# Allegro board AX7Z010B_AX7Z020B_Allegro.brd
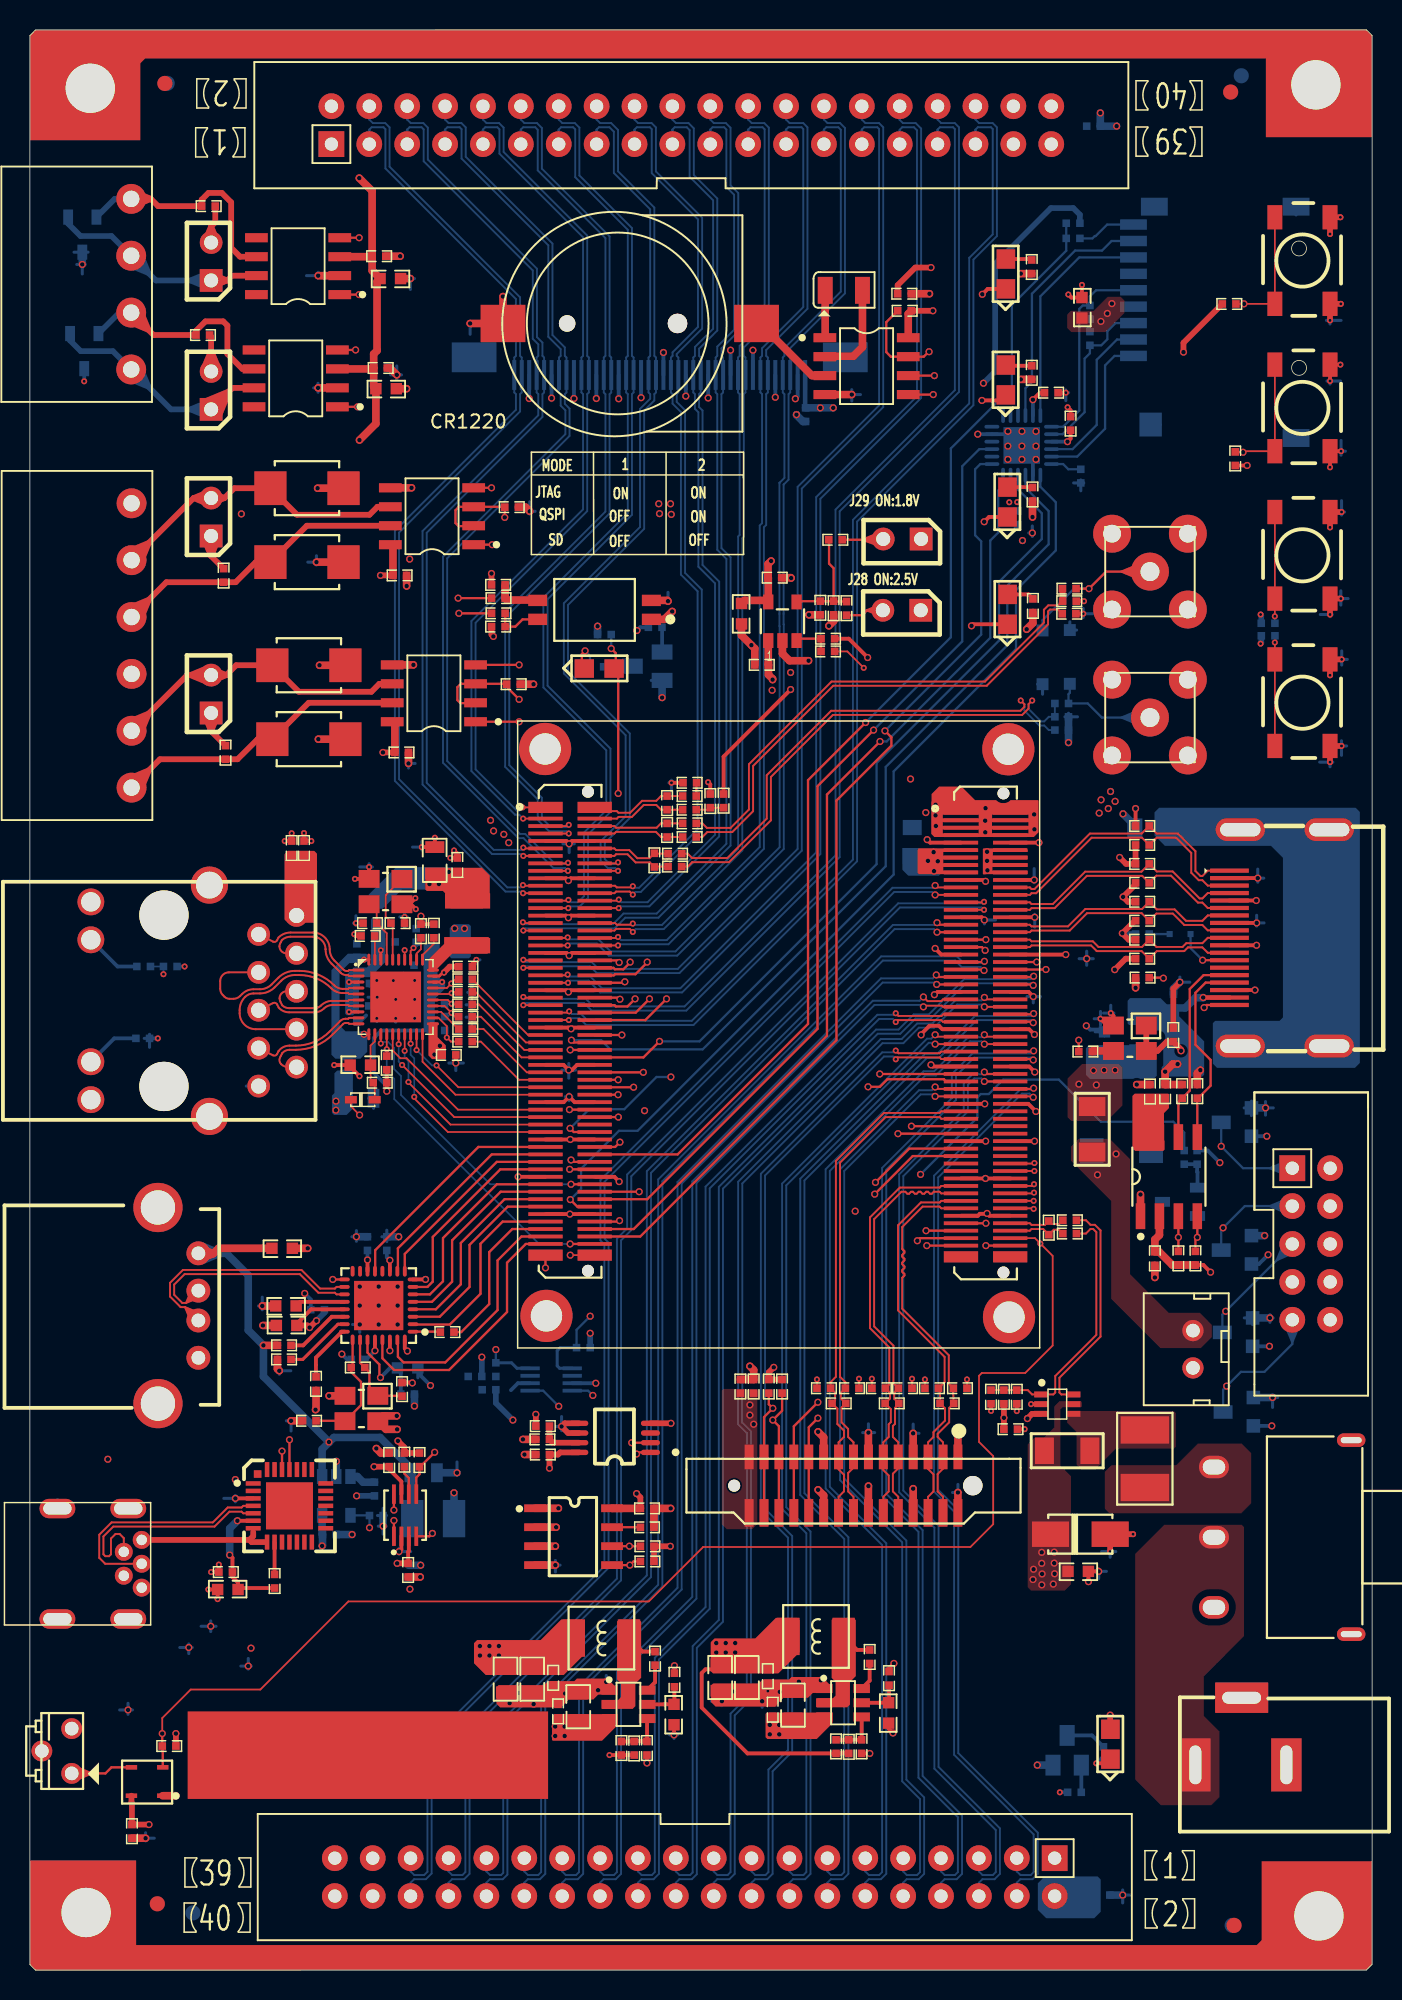
[diagram p0: board, top side]
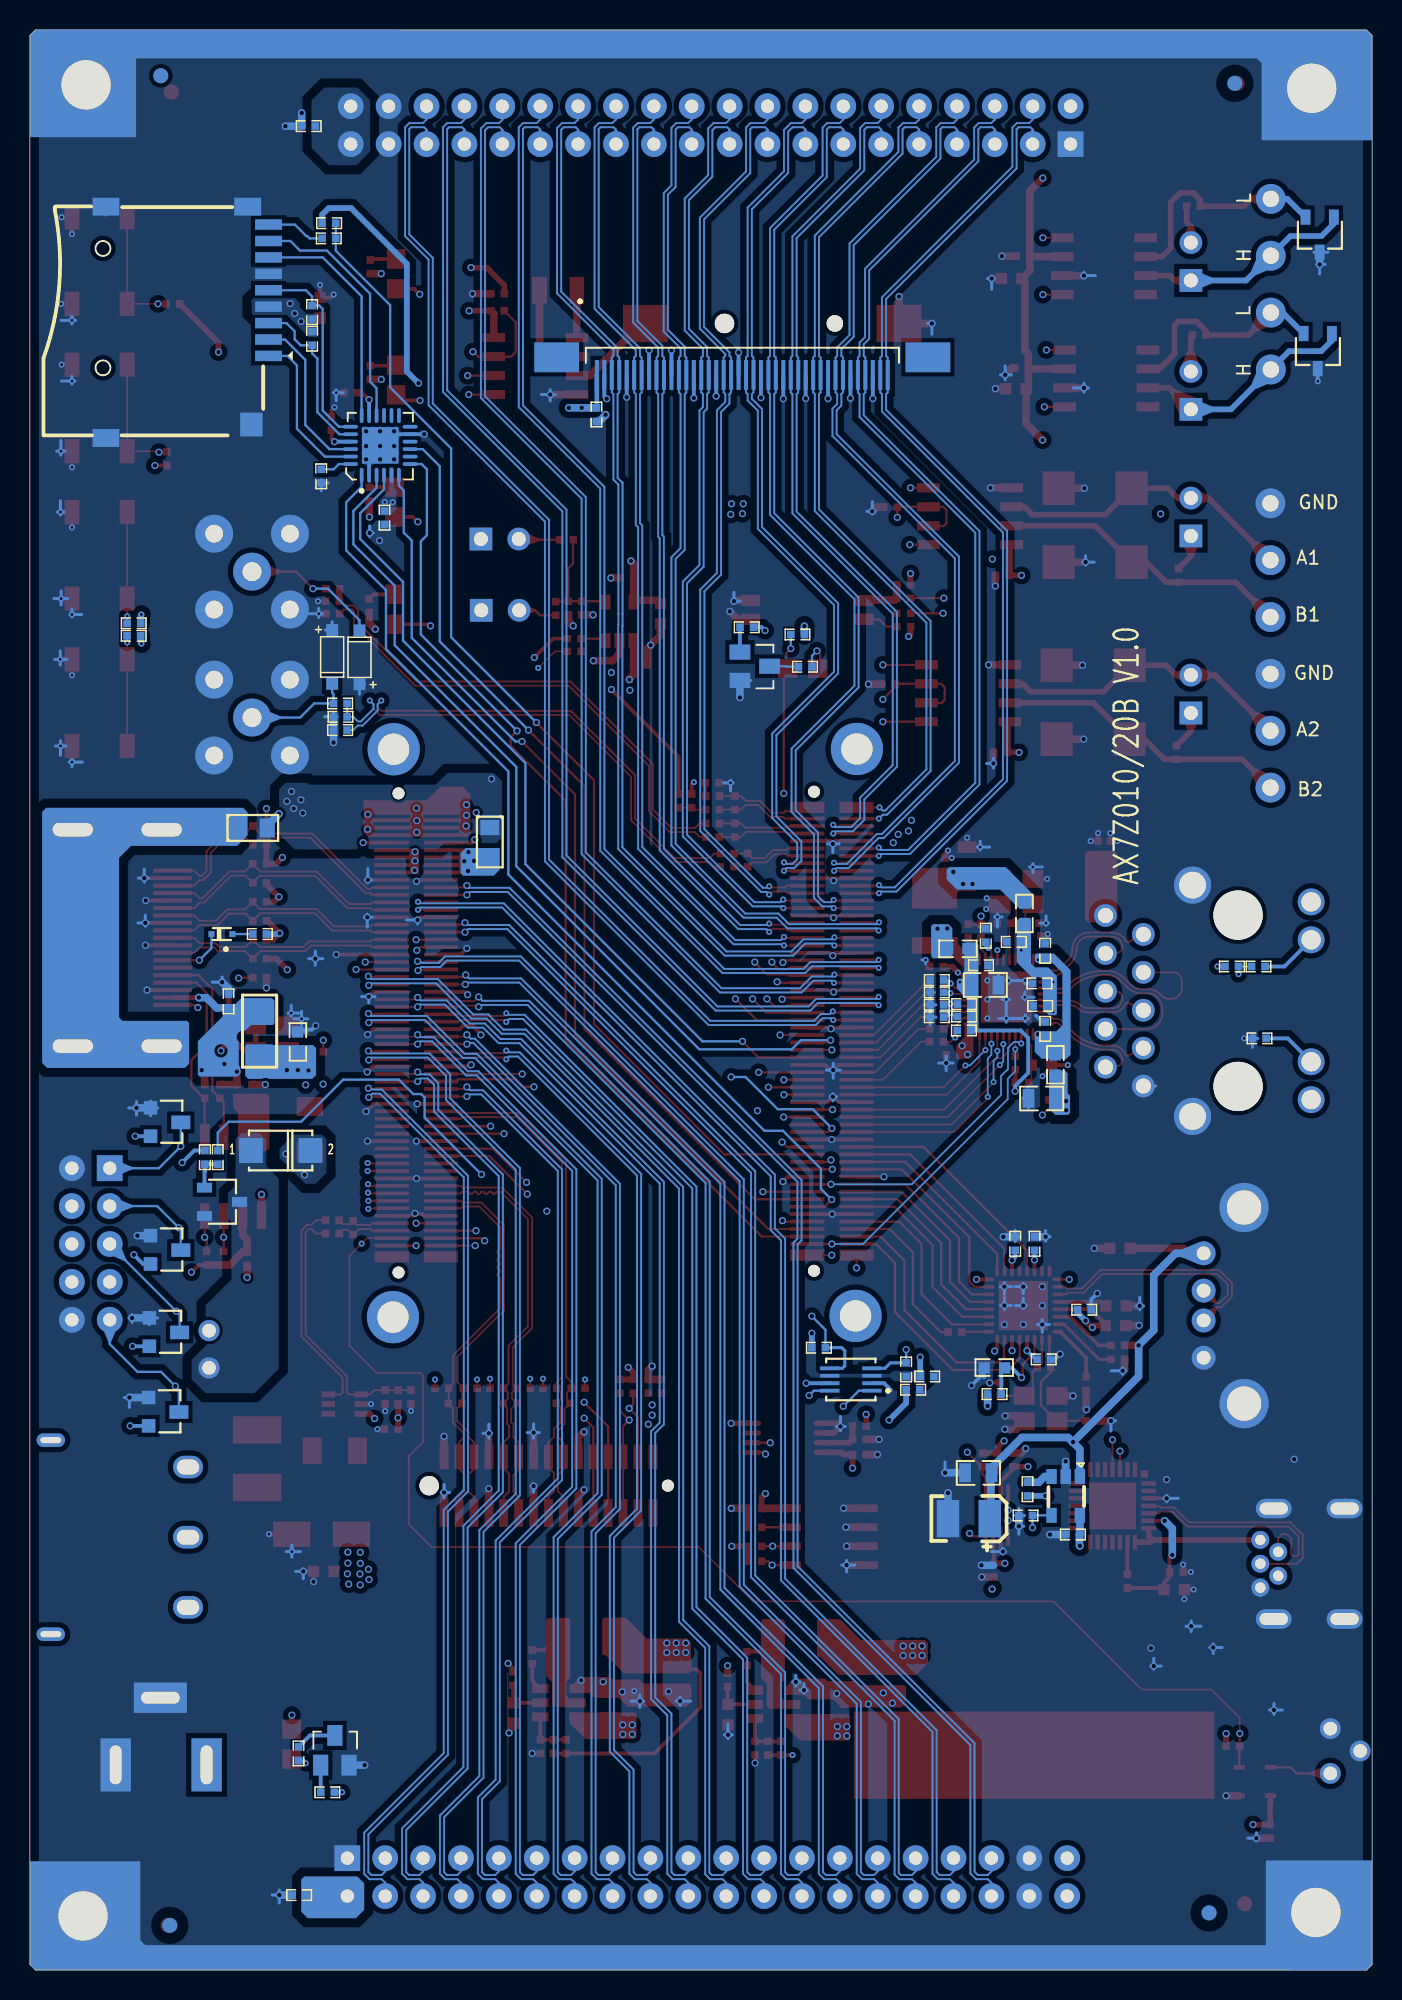
[diagram p1: board, bottom side, seen from below]

Outline 89.99 x 130 mm; copper layers: TOP, L2_GND, L3_SIG, L4_SIG, L5_GND, BOTTOM. Coordinates in mm from the lower left corner of the outline.
Outline path: 0,129.62 0.38,130 89.61,130 89.99,129.62 89.99,0.39 89.61,0.01 0.38,0 0,0.38 0,129.62

## Design rules (mm)
net group HDMI_D0_N: nets HDMI_D0_N HDMI_D0_P
net group IO1_10N: nets IO1_10N IO1_10P
net group IO1_12N: nets IO1_12N IO1_12P
net group IO1_15P: nets IO1_15N IO1_15P
net group IO1_17P: nets IO1_17N IO1_17P
net group IO2_10P: nets IO2_10N IO2_10P
net group PHY_MDI1_N: nets PHY_MDI1_N PHY_MDI1_P
net group PHY_MDI2_P: nets PHY_MDI2_N PHY_MDI2_P
net group PHY_MDI3_N: nets PHY_MDI3_N PHY_MDI3_P
net group BL-DIFF: nets HDMI_SCL HDMI_SDA KEY1 KEY2 KEY3 KEY4 PL_GCLK1
net group ETH_RX: nets ETH_RXCK ETH_RXCTL ETH_RXD0 ETH_RXD1 ETH_RXD2 ETH_RXD3
net group ETH_TX: nets ETH_TXCK ETH_TXCTL ETH_TXD0 ETH_TXD1 ETH_TXD2 ETH_TXD3
net group HDMI: nets HDMI_CLK_N HDMI_CLK_P HDMI_D1_N HDMI_D1_P HDMI_D2_N HDMI_D2_P LP_CLK_N LP_CLK_P LP_LANE0_N LP_LANE0_P LP_LANE1_N LP_LANE1_P MIPI_CLK_N MIPI_CLK_P MIPI_LAN0_N MIPI_LAN0_P MIPI_LAN1_N MIPI_LAN1_P VN VP XADC_AD1N XADC_AD1N_C XADC_AD1P XADC_AD1P_C XADC_AD9N XADC_AD9N_C XADC_AD9P XADC_AD9P_C XADC_AD12N XADC_AD12N_C XADC_AD12P XADC_AD12P_C XADC_VN_C XADC_VP_C
net group J20-DIFF: nets IO1_1N IO1_1P IO1_2N IO1_2P IO1_3N IO1_3P IO1_4N IO1_4P IO1_5N IO1_5P IO1_6N IO1_6P IO1_7N IO1_7P IO1_8N IO1_8P IO1_9N IO1_9P IO1_11N IO1_11P IO1_13N IO1_13P IO1_14N IO1_14P IO1_16N IO1_16P
net group J21-DIFF: nets IO2_1N IO2_1P IO2_2N IO2_2P IO2_3N IO2_3P IO2_4N IO2_4P IO2_5N IO2_5P IO2_6N IO2_6P IO2_7N IO2_7P IO2_8N IO2_8P IO2_9N IO2_9P IO2_11N IO2_11P IO2_12N IO2_12P IO2_13N IO2_13P IO2_14N IO2_14P IO2_15N IO2_15P IO2_16N IO2_16P IO2_17N IO2_17P
net group OTG_DATA: nets OTG_CLK OTG_DATA0 OTG_DATA1 OTG_DATA2 OTG_DATA3 OTG_DATA4 OTG_DATA5 OTG_DATA6 OTG_DATA7 OTG_DIR OTG_NXT OTG_STP
net group PHY_MDI: nets N20328299 N20328339 OTG_D_N OTG_D_P PHY_MDI0_N PHY_MDI0_P
nets with their own width: min track width 0.254; nets GND

## Placement (name value [footprint] x y rotation side)
BT1  BATTERY  [BATSO]  49.72 110.33 0 top
C1  0.1uF/10V  [C0402]  6.85 9.3 270 top
C2  900pF  [C0402]  68.31 49.73 270 top
C3  1uF/25V  [C0402]  17.55 75.19 90 top
C5  900pF  [C0402]  41.87 74.37 90 top
C6  0.1uF/10V  [C0402]  23.51 107.34 180 top
C7  10uF/10V  [C0603]  23.89 105.96 0 top
C8  0.1uF/10V  [C0402]  23.41 114.83 180 top
C9  10uF/10V  [C0603]  24.17 113.34 0 top
C10  0.1uF/10V  [C0402]  24.8 93.45 0 top
C11  0.1uF/10V  [C0402]  25.36 26.8 270 top
C12  0.1uF/10V  [C0402]  24.09 34.19 90 top
C13  1uF/25V  [C0402]  13.13 26.67 180 top
C14  10uF/10V  [C0603]  13.27 25.5 180 top
C15  10uF/10V  [C0603]  70.54 111.38 90 top
C16  0.1uF/10V  [C0402]  68.48 105.69 0 top
C17  0.1uF/10V  [C0402]  66.22 97.31 270 bottom
C18  0.1uF/10V  [C0402]  69.77 103.63 90 top
C19  900pF  [C0402]  42.72 76.38 270 top
C20  900pF  [C0402]  42.72 78.21 90 top
C23  0.01uF/10V  [C0402]  41.92 20.89 90 top
C26  150pF  [C0402]  39.66 14.87 270 top
C29  22uF/10V  [C0805]  36.78 17.65 90 top
C30  0.1uF/10V  [C0402]  35.09 19.57 270 top
C34  22uF/10V  [C0805]  31.89 19.5 270 top
C37  4.7uF/10V  [C0603]  17.21 43.19 180 top
C38  0.1uF/10V  [C0402]  19.29 44.25 180 bottom
C39  0.1uF/10V  [C0402]  22.01 40.92 180 bottom
C40  0.1uF/10V  [C0402]  23.93 48.68 90 bottom
C41  0.1uF/10V  [C0402]  22.64 48.68 90 bottom
C42  10uF/10V  [C0603]  25.33 40.35 0 bottom
C43  4.7uF/10V  [C0603]  17.17 44.5 0 top
C44  18pF/10V  [C0402]  24.96 38.91 270 top
C45  18pF/10V  [C0402]  18.73 36.81 0 top
C46  0.1uF/10V  [C0402]  20.08 29.19 0 bottom
C47  22uF/10V  [C0805]  26.4 33.33 0 bottom
C48  100uF/10V  [TAN-SMB]  27.04 30.25 180 bottom
C49  4.7uF/10V  [C0603]  16.92 48.36 0 top
C50  0.1uF/10V  [C0402]  41.39 30.94 0 top
C51  1uF/25V  [C0402]  47.64 39.12 90 top
C52  0.1uF/10V  [C0402]  34.38 34.55 180 top
C53  0.1uF/10V  [C0402]  24.93 81.59 0 top
C54  0.1uF/10V  [C0402]  75.43 47.68 270 top
C55  10uF/10V  [C0603]  72.05 62.18 90 bottom
C56  0.1uF/10V  [C0402]  76.67 64.92 90 bottom
C57  0.1uF/10V  [C0402]  75.1 58.88 90 top
C58  0.1uF/10V  [C0402]  71.95 5.03 0 bottom
C59  0.1uF/10V  [C0402]  71.31 123.55 0 bottom
C68  0.1uF/10V  [C0402]  49.06 87.45 180 top
C69  10uF/10V  [C0603]  47.71 90.88 270 top
C70  0.1uF/10V  [C0402]  49.95 93.3 0 top
C71  0.1uF/10V  [C0402]  52.01 104.22 270 bottom
C72  0.1uF/10V  [C0402]  48.53 39.12 90 top
C73  10uF/10V  [C0603]  70.29 26.72 0 top
C74  0.1uF/10V  [C0402]  65.76 36.25 0 top
C75  0.1uF/10V  [C0402]  66.17 38.4 270 top
C93  0.1uF/10V  [C0402]  22.27 64.6 0 bottom
C94  0.1uF/10V  [C0402]  21.92 68.31 90 bottom
C97  0.1uF/10V  [C0402]  29.21 67.24 0 top
C101  0.1uF/10V  [C0402]  26.21 67.33 180 bottom
C106  0.1uF/10V  [C0402]  22.31 66.11 0 bottom
C109  22uF/10V  [C0805]  25.94 66 180 bottom
C113  0.1uF/10V  [C0402]  24.04 68.89 0 bottom
C119  0.1uF/10V  [C0402]  21.92 63.08 90 bottom
C127  22uF/10V  [C0805]  22.15 58.41 0 bottom
C151  10uF/10V  [C0603]  43.19 17.13 270 top
C194  150pF  [C0402]  54.05 14.98 270 top
C198  NC  [C0603]  57.58 17.23 270 top
C200  22uF/10V  [C0805]  51.17 17.75 90 top
C203  0.1uF/10V  [C0402]  49.48 19.68 270 top
C204  22uF/10V  [C0805]  48.06 19.61 270 top
C205  22uF/10V  [C0805]  46.27 19.61 270 top
C209  0.01uF/10V  [C0402]  56.3 21 90 top
C214  0.1uF/10V  [C0402]  29.84 39.78 0 bottom
C215  0.1uF/10V  [C0402]  30.78 38.89 0 bottom
C280  0.1uF/10V  [C0402]  76.66 62.66 90 top
C289  0.1uF/10V  [C0402]  58.64 112.32 0 top
C290  18pF/10V  [C0402]  22.79 70.15 180 top
C291  18pF/10V  [C0402]  24.67 70.15 0 top
C292  0.1uF/10V  [C0402]  18.38 75.19 90 top
C293  22uF/10V  [C0805]  27.15 74.36 90 top
C294  0.1uF/10V  [C0402]  28.66 74.06 90 top
C295  0.1uF/10V  [C0402]  28.1 61.32 0 top
C296  NC  [C0603]  22.16 60.64 180 top
C297  22uF/10V  [C0805]  33.67 19.5 270 top
C298  0.1uF/10V  [C0402]  35.41 17.35 90 top
C299  0.1uF/10V  [C0402]  49.8 17.46 90 top
CN1  AJ243-3-3C  [CN1_DCJACK]  84.24 13.75 90 top
D1  BAT54S  [SOT23]  81.9 57.77 270 bottom
D2  BAT54S  [SOT23]  81.9 49.21 270 bottom
D3  BAT54S  [SOT23]  81.98 43.7 270 bottom
D4  BAT54S  [SOT23]  82.03 38.37 270 bottom
D5  SM24CANA-02HTG  [SOT23-3]  3.53 116.28 0 bottom
D6  SM24CANA-02HTG  [SOT23-3]  3.66 108.48 0 bottom
D7  SMBJ6.0CA  [SMBJ6-0CA]  18.58 99.29 180 top
D8  SMBJ6.0CA  [SMBJ6-0CA]  18.58 94.34 180 top
D9  -  [BAS16XV2T1G]  77.11 69.42 180 bottom
D10  SMAJ5.0CA  [SMAJ5]  70.43 29.21 0 top
D11  SMBJ6.0CA  [SMBJ6-0CA]  18.71 82.48 180 top
D12  SMBJ6.0CA  [SMBJ6-0CA]  18.71 87.43 180 top
D14  DL4148  [DO-214AC]  73.18 54.91 180 bottom
D15  B0520LW  [SOD-123]  67.89 87.96 270 bottom
D16  B0520LW  [SOD-123]  69.72 87.99 90 bottom
D17  BAS16XV2T1G  [SOD-523]  22.32 58.32 270 top
F1  PTS120630V012  [L1206]  74.59 62.92 90 bottom
F2  2A  [FUSE_1812]  74.75 34.26 90 top
HOLE1  NC  [FPAD_1]  4.05 126.09 0 top
HOLE2  NC  [FPAD_1]  3.77 3.86 0 top
HOLE3  NC  [FPAD_1]  86.42 3.63 0 top
HOLE4  NC  [FPAD_1]  86.22 126.32 0 top
J1  -  [AXK6A2337YG]  64.07 62.79 270 top
J2  -  [AXK6A2337YG]  36.22 62.9 270 top
J3  HEADER 5X2  [JTAG-10]  84.64 53.73 270 top
J4  MSA Connector  [SMA_P]  75.1 83.92 90 top
J5  MSA Connector  [SMA_P]  75.1 93.7 90 top
J8  2-Jumper  [JUMPER2]  12.15 113.21 90 top
J9  HR911130A  [GE_RJ45]  8.99 70.69 180 top
J10  2-Jumper  [JUMPER2]  12.15 104.57 90 top
J11  2-Jumper  [JUMPER2]  12.15 96.09 90 top
J12  MINI_USB  [MINI_USB_DIP]  6.6 27.23 270 top
J13  Micro SD  [MICRO_SD]  73.99 108.15 270 bottom
J14  -  [CON2_2_54P]  77.98 42.85 270 top
J15  USB TYPEA  [USB_TYPEA]  11.3 48.03 270 top
J19  HDMI Connector (TYPEA)  [MINI_HDMI]  80.42 73.67 90 top
J20  HEADER 20x2/M  [IDC-40J]  44.58 6.23 180 top
J21  HEADER 20x2/M  [IDC-40J]  44.35 123.61 0 top
J22  CON40/NC  [FPC-40-5]  42.23 107.47 0 bottom
J23  CON15  [FPC1025L-NP]  55.22 32.46 180 top
J24  2-Jumper  [JUMPER2]  12.15 84.23 90 top
J28  2-Jumper  [JUMPER2]  59.73 91.11 180 top
J29  2-Jumper  [JUMPER2]  59.75 95.89 180 top
J40  -  [HT3_81-6PL]  6.82 86.85 270 top
J41  -  [HT3_81-4PL]  6.79 107.25 270 top
KEY1  Button  [KEY_4X4X1_5]  85.32 84.92 270 top
KEY2  Button  [KEY_4X4X1_5]  85.32 94.79 270 top
KEY3  Button  [KEY_4X4X1_5]  85.32 104.67 270 top
KEY4  Button  [KEY_4X4X1_5]  85.32 114.54 270 top
L1  2.2uH  [LVS303010]  29.35 69.14 0 top
L2  CMLB041B-4R7MS  [L4_4X4_2]  38.32 22.25 270 top
L6  120OHM@100Mhz  [L0603]  27.78 68.45 180 bottom
L8  120OHM@100Mhz  [L0603]  21.26 60.65 90 bottom
L9  120OHM@100Mhz  [L0603]  23.29 70.81 270 bottom
L11  CMLB041B-4R7MS  [L4_4X4_2]  52.71 22.36 270 top
LED1  POWER  [LED0805]  72.44 15.14 0 top
LED2  DONE  [LED0805]  38.17 87.21 270 top
LED3  RED  [LED0805]  65.55 91.17 0 top
LED4  RED  [LED0805]  65.54 98.36 0 top
LED5  RED  [LED0805]  65.43 106.54 0 top
LED6  RED  [LED0805]  65.44 113.64 0 top
NOREF  -  [unnamed]  8.55 4.45 0 top
NOREF#2  -  [unnamed#2]  65.6 81.8 0 top
NOREF#3  -  [unnamed]  9.05 126.41 0 top
NOREF#4  -  [unnamed#2]  65.65 43.75 0 top
NOREF#5  -  [unnamed#2]  34.54 81.82 0 top
NOREF#6  -  [unnamed]  80.51 125.83 0 top
NOREF#7  -  [unnamed#2]  34.64 43.83 0 top
NOREF#8  -  [#2]  236.27 67.23 0 top
NOREF#9  -  [unnamed]  80.73 3 0 top
NOREF#10  -  [unnamed]  9.21 126.42 180 bottom
NOREF#11  -  [unnamed]  81.22 126.93 180 bottom
NOREF#12  -  [unnamed]  10.93 3.84 180 bottom
NOREF#13  -  [unnamed]  80.61 3 180 bottom
Q1  MMBT3904LT1G  [SOT-23]  69.55 14.72 270 bottom
Q2  MMBT3904LT1G  [SOT-23]  41.4 87.36 0 bottom
Q5  NDS331N  [SOT23-3]  77.11 51.46 270 bottom
R1  10K  [R0402]  31.41 92.81 0 top
R2  10K  [R0402]  31.41 90.02 0 top
R3  20K/1%  [R0402]  31.41 90.91 180 top
R4  20K/1%  [R0402]  31.41 91.92 180 top
R5  2.49K/1%  [R0402]  22.66 69.29 0 top
R8  33R  [R0402]  29.21 66.39 0 top
R9  NC  [R0402]  9.33 15.01 180 top
R10  2K/1%  [R0402]  69.18 84.87 180 bottom
R11  100R/1%  [R0402]  69.71 50.24 180 top
R12  220R/1%  [R0402]  69.18 83.97 0 bottom
R13  100R/1%  [R0402]  69.71 49.35 180 top
R14  200R/1%  [R0402]  69.18 83.08 180 bottom
R15  100K  [R0402]  23.47 59.46 0 top
R23  15K/1%  [R0402]  41.37 14.87 270 top
R25  2K/1%  [R0402]  69.69 92.56 180 top
R26  100R/1%  [R0402]  43.24 73.94 180 top
R27  220R/1%  [R0402]  69.7 91.72 0 top
R28  100R/1%  [R0402]  43.24 74.8 180 top
R29  200R/1%  [R0402]  69.67 90.88 180 top
R30  120R  [R0402]  11.98 118.19 180 top
R31  120R  [R0402]  11.6 109.55 180 top
R32  120R  [R0402]  12.99 93.45 90 top
R33  4.7K  [R0402]  32.3 98.02 180 top
R34  10K  [R0402]  16.41 26.06 270 top
R35  10K  [R0402]  26.12 34.19 90 top
R36  1K  [R0402]  25.11 34.19 270 top
R37  NC  [R0402]  71.07 111.07 270 bottom
R38  4.7K  [R0402]  71.07 109.32 90 bottom
R39  4.7K  [R0402]  70.46 100.1 90 bottom
R40  10K  [R0402]  69.94 117.04 0 bottom
R41  330R  [R0402]  69.94 116.03 180 bottom
R50  100R/1%  [R0402]  44.22 76.83 180 top
R53  4.7K  [R0402]  9.41 67.24 0 bottom
R54  510R  [R0402]  7.63 67.24 0 bottom
R55  4.7K  [R0402]  29.17 66.34 180 bottom
R56  100R/1%  [R0402]  44.22 75.92 180 top
R57  200R/1%  [R0402]  44.25 79.55 0 top
R58  1.5K  [R0402]  25.33 38.59 0 bottom
R59  33R  [R0402]  27.98 42.75 180 top
R60  1M  [R0402]  22 40.38 0 top
R61  8K06  [R0402]  19.19 39.3 90 top
R62  1K  [R0402]  17.06 41.86 0 top
R63  100K  [R0402]  23.11 32.23 90 bottom
R64  10K  [R0402]  23.23 30.46 180 bottom
R65  4.7K  [R0402]  41.39 27.38 180 top
R66  4.7K  [R0402]  41.39 28.4 180 top
R67  0R  [R0402]  41.39 29.67 0 top
R68  0R  [R0805]  59.16 75.59 270 bottom
R69  33R  [R0402]  70.78 61.55 0 top
R70  4.7K  [R0402]  50.43 39.12 90 top
R71  NC  [R0402]  34.38 36.45 180 top
R72  0R  [R0402]  34.38 35.56 0 top
R73  330R  [R0402]  38.52 89.49 180 bottom
R74  10K  [R0402]  70.03 11.92 180 bottom
R75  390R  [R0402]  71.98 14.51 270 bottom
R76  200R/1%  [R0402]  38.01 87.33 180 bottom
R77  330R  [R0402]  67.25 91.42 90 top
R78  330R  [R0402]  67.22 98.88 90 top
R79  330R  [R0402]  67.17 107.04 90 top
R80  330R  [R0402]  67.17 114.12 90 top
R81  10K  [R0402]  83.02 89.4 180 bottom
R82  10K  [R0402]  83.01 90.24 180 bottom
R83  10K  [R0402]  80.81 101.27 270 top
R84  10K  [R0402]  80.4 111.64 180 top
R85  27K  [R0402]  74.59 69.42 0 bottom
R86  49R9  [R0402]  74.59 76.66 0 top
R87  49R9  [R0402]  74.59 75.39 0 top
R88  49R9  [R0402]  74.59 74.12 0 top
R89  49R9  [R0402]  74.59 72.85 0 top
R90  49R9  [R0402]  74.59 71.58 0 top
R91  49R9  [R0402]  74.59 70.31 0 top
R92  49R9  [R0402]  74.59 69.04 0 top
R93  49R9  [R0402]  74.59 67.77 0 top
R94  120R  [R0402]  13.12 81.59 90 top
R95  100K  [R0402]  74.59 66.5 180 top
R96  0R  [R0805]  75.04 76.53 180 bottom
R97  4.7K  [R0402]  32.42 86.16 180 top
R98  1K  [R0402]  78.14 47.7 90 top
R99  1K  [R0402]  77 47.7 90 top
R100  200K  [R0402]  76.11 58.88 270 top
R101  1.5K  [R0402]  77.25 58.88 270 top
R102  1.5K  [R0402]  78.27 58.88 270 top
R108  33.6K/1%  [R0402]  53.89 91.26 90 top
R109  20K/1%  [R0402]  53 91.26 270 top
R110  52.3K 1%  [R0402]  54.75 91.24 270 top
R111  12.7K/1%  [R0402]  54.01 95.84 0 top
R112  4.7K  [R0402]  49.54 39.12 90 top
R113  100R/1%  [R0402]  62.37 38.99 0 top
R114  150R  [R0402]  61.48 37.97 0 top
R115  100R/1%  [R0402]  60.46 38.99 180 top
R116  150R  [R0402]  57.8 37.97 0 top
R117  150R  [R0402]  54.24 37.97 0 top
R118  100R/1%  [R0402]  58.69 38.99 0 top
R119  100R/1%  [R0402]  55.13 38.99 0 top
R120  100R/1%  [R0402]  56.91 38.99 180 top
R121  100R/1%  [R0402]  53.23 38.99 180 top
R122  10K  [R0402]  17.06 40.92 0 top
R126  0.005R 1/4W  [R1206]  69.55 34.8 0 top
R127  220R/1%  [R0402]  45.62 78.34 90 top
R128  2K/1%  [R0402]  46.51 78.34 270 top
R129  100R/1%  [R0402]  44.22 77.75 180 top
R130  100R/1%  [R0402]  44.22 78.66 180 top
R131  6.34K/1%  [R0402]  65.3 38.4 270 top
R132  100R/1%  [R0402]  64.44 38.4 270 top
R148  4.7K  [R0402]  37.11 41.71 0 bottom
R149  4.7K  [R0402]  31.24 40.23 270 bottom
R179  10R  [R1206]  71.22 56.34 270 top
R180  4.7K  [R0402]  78.26 54.46 270 bottom
R181  100R/1%  [R0402]  77.39 54.46 270 bottom
R234  10K  [R0402]  58.64 111.18 180 top
R235  4.7K  [R0402]  27.09 69.62 270 top
R236  1.5K  [R0402]  23.93 60.78 270 top
R237  4.7K  [R0402]  26.22 69.62 90 top
R238  4.7K  [R0402]  25.9 69.32 90 bottom
R239  33R  [R0402]  29.21 65.54 0 top
R240  510R  [R0402]  7.57 62.43 0 bottom
R241  NC  [R0402]  29.17 64.68 180 bottom
R242  NC  [R0402]  29.17 63.85 180 bottom
R243  4.7K  [R0402]  27.35 63.89 180 bottom
R244  4.7K  [R0402]  27.35 64.73 180 bottom
R245  4.7K  [R0402]  27.36 62.96 180 bottom
R246  4.7K  [R0402]  29.17 65.51 180 bottom
R247  18.7K/1%  [R0402]  40.52 14.87 90 top
R248  10K  [R0402]  43.21 19.44 270 top
R249  18K/1%  [R0402]  55.76 14.98 270 top
R250  56.2K/1%  [R0402]  54.9 14.98 90 top
R252  10K  [R0402]  57.6 19.55 270 top
R253  10K  [R0402]  41.92 89.97 180 bottom
R254  0R  [R0402]  53.5 89.21 180 top
R255  NC  [R0402]  53.5 88.35 180 top
R256  33R  [R0402]  29.21 62.21 0 top
R257  33R  [R0402]  29.21 63.06 0 top
R258  33R  [R0402]  29.21 63.88 0 top
R259  33R  [R0402]  29.21 64.71 0 top
RST_KEY  key_side  [TS-026-3_3D8]  2.81 14.68 90 top
SW1  SW DIP-2  [2P2_1_27MM]  37.86 91.14 90 top
SW8  SW SPDT/SM  [SS-12D11]  84.89 29.01 270 top
TP2  NC  [MARK]  34.61 21.72 0 top
TP3  NC  [MARK]  49 21.83 0 top
U1  -  [TCM811TERCTR]  7.86 12.64 90 top
U2  SN65HVD232  [SO8]  20.78 112.26 180 top
U3  SN65HVD232  [SO8]  20.62 104.74 180 top
U4  MAX3485  [SO8]  29.76 95.51 180 top
U5  CP2102-GM  [QFN-28]  17.41 31.11 0 top
U6  TXS0102DCU  [TSSOP8]  25.16 30.48 0 top
U7  TXS02612RTWR  [QFN24_RTW]  66.5 102.16 90 bottom
U8  JL2121-N040I  [QFN40-5X5]  22.03 62.7 0 top
U9  -  [USB3320C]  23.39 44.53 180 top
U10  -  [TPS2051BDBV]  19.6 33.07 270 bottom
U11  24LC04  [8S1_SOIC8]  36.45 29.04 90 top
U12  MAX3485  [SO8]  29.88 83.64 180 top
U13  LM75  [MICRO8]  39.21 35.66 90 top
U15  GTL2002D  [GTL2002GM]  76.37 53.16 0 top
U16  ETA1471FT2G  [SOT23-6]  40.13 17.81 270 top
U17  ETA1471FT2G  [SOT23-6]  54.52 17.92 270 top
U18  SPX3819M5-ADJ  [SOT-23-5]  50.46 90.37 0 top
U27  TXS0102DCU  [TSSOP8]  34.95 39.57 90 bottom
U39  DS1338  [SO8]  53.3 109.37 0 top
U40  INA199A1DCKR  [PDSO-G6]  68.88 37.92 270 top
X2  SiT8008BI21-33E-50.000000  [OSC3225]  73.75 62.44 180 top
Y1  25MHZ  [OSC3225]  23.85 72.27 180 top
Y2  24MHZ  [OSC3225]  22.23 37.63 180 top
Y4  32.768Khz  [OSC3215]  54.57 112.55 0 top

## Library data of the parts
BT1 = BATTERY_5
C1 C2 C5-C9 C11-C20 C23 C26 C29 C34 C37-C47 C49-C52 C54-C59 C68-C71 C73-C75 C93 C94 C97 C101 C106 C109 C113 C119 C127 C151 C194 C198 C200 C204 C205 C209 C214 C215 C280 C289-C291 C293-C297 = CAP NP
C3 C292 = CAP_3
C10 C53 = C0603_0
C30 C72 C203 C298 C299 = C_1
C48 = CAP POL
CN1 = AJ243_0
D1-D4 = SBL1645CT/TO_0
D5 D6 = THBT200S/SIP_2
D7 D8 D11 D12 = 1N5819_0
D9 = BZX84C36/SOT_1
D10 = 1N5819
D14 = BZX84C33/SOT_0
D15 D16 = BZX84C36/SOT_2
D17 = BZX84C36/SOT_0
F1 = FUSE/SM
F2 = FUSE
HOLE1-HOLE4 = TEST POINT
J1 J2 = CONN SOCKET 60x2_0
J3 = HEADER 5X2
J4 J5 = RCA JACK_2
J8 J10 J11 J24 J28 J29 = 2-Jumper_1
J9 = GE_RJ45_2
J12 = USB_B_3
J13 = Micro SD_1
J14 = CON2-2_54P
J15 = USB_B_4
J19 = HDMI Connector
J20 J21 = HEADER 20x2/M
J22 = CON40_0
J23 = CON15_0
J40 = HT3_0
J41 = HT3_81-4PL
KEY1-KEY4 = Button_0
L1 L6 L8 L9 = INDUCTOR
L2 L11 = CHOKE RF-IRON_0
LED1-LED6 = LN211WP
Q1 Q2 = L14P2/TO_1
Q5 = NDS331N
R1-R5 R8 R9 R15 R23 R32-R35 R37-R41 R53-R55 R58-R63 R65-R102 R108-R122 R126 R148 R149 R234-R247 R249 R250 R253-R259 = RESISTOR
R10-R14 R25-R29 R50 R56 R57 R127-R132 = R
R30 R31 R179-R181 = R1005_0
R36 = RESISTOR_0
R64 = RESISTOR: signal model: R_GENERIC_R0402_33R_33R
R248 R252 = 100K
RST_KEY = key_slide_3
SW1 = SW DIP-2
SW8 = SW SPDT/SM_0
TP2 TP3 = TP
U1 = TCM811TERCTR_0
U2 U3 = TJA1050_1
U4 U12 = MAX485
U5 = CP2102_2
U6 U27 = TXS0102DCU_1
U7 = TXS02612RTWR_0
U8 = JL2121D-N040I
U9 = USB3320C-EZK_6
U10 = TPS2051BDBV
U11 = ATSHA204_2
U13 = LM75
U15 = GTL2002GM
U16 U17 = ETA1471FT2G
U18 = SPX3819M5-2-5_0
U39 = DS1338
U40 = INA199A1DCKR
X2 = OSC
Y1 Y2 = X3_0
Y4 = CRYSTAL_1

## Footprints (pads in the part's own frame, mm; a bottom-side part is the same pattern mirrored in y, then rotated)
2P2_1_27MM
  rect 0.76x1.27 smd: 1(-0.635,-3.81) 2(0.635,-3.81) 3(0.635,3.81) 4(-0.635,3.81)
8S1_SOIC8
  rect 0.518x1.458 smd: 1(1.905,2.58) 2(0.635,2.58) 3(-0.635,2.58) 4(-1.905,2.58) 5(-1.905,-2.58) 6(-0.635,-2.58) 7(0.635,-2.58) 8(1.905,-2.58)
AXK6A2337YG
  round 0.8 hole 0.8 unplated: (-16.05,1.2) (16.05,1.2)
  rect 0.75x2.3 smd: 1(-15,-1.65) 2(-15,1.65) 119(15,-1.65) 120(15,1.65)
  rect 0.25x2.3 smd: 3(-14.25,-1.65) 4(-14.25,1.65) 5(-13.75,-1.65) 6(-13.75,1.65) 7(-13.25,-1.65) 8(-13.25,1.65) 9(-12.75,-1.65) 10(-12.75,1.65) 11(-12.25,-1.65) 12(-12.25,1.65) 13(-11.75,-1.65) 14(-11.75,1.65) 15(-11.25,-1.65) 16(-11.25,1.65) 17(-10.75,-1.65) 18(-10.75,1.65) 19(-10.25,-1.65) 20(-10.25,1.65) 21(-9.75,-1.65) 22(-9.75,1.65) 23(-9.25,-1.65) 24(-9.25,1.65) 25(-8.75,-1.65) 26(-8.75,1.65) 27(-8.25,-1.65) 28(-8.25,1.65) 29(-7.75,-1.65) 30(-7.75,1.65) 31(-7.25,-1.65) 32(-7.25,1.65) 33(-6.75,-1.65) 34(-6.75,1.65) 35(-6.25,-1.65) 36(-6.25,1.65) 37(-5.75,-1.65) 38(-5.75,1.65) 39(-5.25,-1.65) 40(-5.25,1.65) 41(-4.75,-1.65) 42(-4.75,1.65) 43(-4.25,-1.65) 44(-4.25,1.65) 45(-3.75,-1.65) 46(-3.75,1.65) 47(-3.25,-1.65) 48(-3.25,1.65) 49(-2.75,-1.65) 50(-2.75,1.65) 51(-2.25,-1.65) 52(-2.25,1.65) 53(-1.75,-1.65) 54(-1.75,1.65) 55(-1.25,-1.65) 56(-1.25,1.65) 57(-0.75,-1.65) 58(-0.75,1.65) 59(-0.25,-1.65) 60(-0.25,1.65) 61(0.25,-1.65) 62(0.25,1.65) 63(0.75,-1.65) 64(0.75,1.65) 65(1.25,-1.65) 66(1.25,1.65) 67(1.75,-1.65) 68(1.75,1.65) 69(2.25,-1.65) 70(2.25,1.65) 71(2.75,-1.65) 72(2.75,1.65) 73(3.25,-1.65) 74(3.25,1.65) 75(3.75,-1.65) 76(3.75,1.65) 77(4.25,-1.65) 78(4.25,1.65) 79(4.75,-1.65) 80(4.75,1.65) 81(5.25,-1.65) 82(5.25,1.65) 83(5.75,-1.65) 84(5.75,1.65) 85(6.25,-1.65) 86(6.25,1.65) 87(6.75,-1.65) 88(6.75,1.65) 89(7.25,-1.65) 90(7.25,1.65) 91(7.75,-1.65) 92(7.75,1.65) 93(8.25,-1.65) 94(8.25,1.65) 95(8.75,-1.65) 96(8.75,1.65) 97(9.25,-1.65) 98(9.25,1.65) 99(9.75,-1.65) 100(9.75,1.65) 101(10.25,-1.65) 102(10.25,1.65) 103(10.75,-1.65) 104(10.75,1.65) 105(11.25,-1.65) 106(11.25,1.65) 107(11.75,-1.65) 108(11.75,1.65) 109(12.25,-1.65) 110(12.25,1.65) 111(12.75,-1.65) 112(12.75,1.65) 113(13.25,-1.65) 114(13.25,1.65) 115(13.75,-1.65) 116(13.75,1.65) 117(14.25,-1.65) 118(14.25,1.65)
BAS16XV2T1G
  rect 0.406x0.406 smd: 1(-0.7,0) 2(0.7,0)
BATSO
  rect 3x2.5 smd: 1(-1,0) 2(-18,0)
  round 1.1 hole 1.1: 3(-13.7,0)
  round 1.3 hole 1.3: 4(-6.3,0)
C0402
  rect 0.508x0.508 smd: 1(-0.457,0) 2(0.457,0)
C0603
  rect 0.762x0.762 smd: 1(-0.686,0) 2(0.686,0)
C0805
  rect 0.787x1.27 smd: 1(-0.889,0) 2(0.889,0)
CN1_DCJACK
  rect 3.556x2.032 hole 2.6x0.8: 1(0,0) 3(0,6.1)
  rect 2.032x3.556 hole 0.8x2.6: 2(4.5,2.997)
CON2_2_54P
  round 1.422 hole 0.914: 1(0,0) 2(2.5,0)
DO-214AC
  rect 1.6x1.676 smd: 1(-1.99,0) 2(1.99,0)
FPAD_1
  round 6.35 hole 3.302: 1(0,0)
FPC1025L-NP
  round 1.3 hole 1.3 unplated: (-8,0)
  rect 0.6x1.65 smd: A1(-7,-1.925) A2(-6,-1.925) A3(-5,-1.925) A4(-4,-1.925) A5(-3,-1.925) A6(-2,-1.925) A7(-1,-1.925) A8(0,-1.925) A9(1,-1.925) A10(2,-1.925) A11(3,-1.925) A12(4,-1.925) A13(5,-1.925) A14(6,-1.925) A15(7,-1.925)
  rect 0.6x1.85 smd: B1(-7,1.825) B2(-6,1.825) B3(-5,1.825) B4(-4,1.825) B5(-3,1.825) B6(-2,1.825) B7(-1,1.825) B8(0,1.825) B9(1,1.825) B10(2,1.825) B11(3,1.825) B12(4,1.825) B13(5,1.825) B14(6,1.825) B15(7,1.825)
  round 0.8 hole 0.8: P2(8,0)
FPC-40-5
  rect 0.27x2 smd: 1(9.75,0.592) 2(9.25,0.592) 3(8.75,0.592) 4(8.25,0.592) 5(7.75,0.592) 6(7.25,0.592) 7(6.75,0.592) 8(6.25,0.592) 9(5.75,0.592) 10(5.25,0.592) 11(4.75,0.592) 12(4.25,0.592) 13(3.75,0.592) 14(3.25,0.592) 15(2.75,0.592) 16(2.25,0.592) 17(1.75,0.592) 18(1.25,0.592) 19(0.75,0.592) 20(0.25,0.592) 21(-0.25,0.592) 22(-0.75,0.592) 23(-1.25,0.592) 24(-1.75,0.592) 25(-2.25,0.592) 26(-2.75,0.592) 27(-3.25,0.592) 28(-3.75,0.592) 29(-4.25,0.592) 30(-4.75,0.592) 31(-5.25,0.592) 32(-5.75,0.592) 33(-6.25,0.592) 34(-6.75,0.592) 35(-7.25,0.592) 36(-7.75,0.592) 37(-8.25,0.592) 38(-8.75,0.592) 39(-9.25,0.592) 40(-9.75,0.592)
  rect 3x2 smd: 41(-12.442,-0.592) 42(12.442,-0.592)
FUSE_1812
  rect 1.829x3.251 smd: 1(-1.93,0) 2(1.93,0)
GE_RJ45
  round 3.3 hole 3.3 unplated: (0,11.48) (0,0)
  round 1.8 hole 1.3: 11(4.9,-0.885) 12(4.9,1.655) 13(4.9,9.825) 14(4.9,12.365)
  round 2.489 hole 1.8: 15(-3.05,-2.01) 16(-3.05,13.49)
  round 1.524 hole 1.016: P1(-8.89,0.025) P2(-6.35,1.295) P3(-8.89,2.565) P4(-6.35,3.835) P5(-8.89,5.105) P6(-6.35,6.375) P7(-8.89,7.645) P8(-6.35,8.915) P9(-8.89,10.185) P10(-6.35,11.455)
GTL2002GM
  rect 0.635x1.727 smd: 1(-1.905,-2.65) 2(-0.635,-2.65) 3(0.635,-2.65) 4(1.905,-2.65) 5(1.905,2.65) 6(0.635,2.65) 7(-0.635,2.65) 8(-1.905,2.65)
HT3_81-4PL
  round 2 hole 1.1: 1(-11.43,0) 2(-7.62,0) 3(-3.81,0) 4(0,0)
HT3_81-6PL
  round 2 hole 1.1: 1(-11.43,0) 2(-7.62,0) 3(-3.81,0) 4(0,0) 5(3.81,0) 6(7.62,0)
IDC-40J
  rect 1.727x1.727 hole 0.889: 1(-24.13,-1.27)
  round 1.727 hole 0.889: 2(-24.13,1.27) 3(-21.59,-1.27) 4(-21.59,1.27) 5(-19.05,-1.27) 6(-19.05,1.27) 7(-16.51,-1.27) 8(-16.51,1.27) 9(-13.97,-1.27) 10(-13.97,1.27) 11(-11.43,-1.27) 12(-11.43,1.27) 13(-8.89,-1.27) 14(-8.89,1.27) 15(-6.35,-1.27) 16(-6.35,1.27) 17(-3.81,-1.27) 18(-3.81,1.27) 19(-1.27,-1.27) 20(-1.27,1.27) 21(1.27,-1.27) 22(1.27,1.27) 23(3.81,-1.27) 24(3.81,1.27) 25(6.35,-1.27) 26(6.35,1.27) 27(8.89,-1.27) 28(8.89,1.27) 29(11.43,-1.27) 30(11.43,1.27) 31(13.97,-1.27) 32(13.97,1.27) 33(16.51,-1.27) 34(16.51,1.27) 35(19.05,-1.27) 36(19.05,1.27) 37(21.59,-1.27) 38(21.59,1.27) 39(24.13,-1.27) 40(24.13,1.27)
JTAG-10
  rect 1.73x1.73 hole 0.89: 1(0,0)
  round 1.73 hole 0.89: 2(0,2.54) 3(2.54,0) 4(2.54,2.54) 5(5.08,0) 6(5.08,2.54) 7(7.62,0) 8(7.62,2.54) 9(10.16,0) 10(10.16,2.54)
JUMPER2
  rect 1.524x1.524 hole 0.94: 1(0,0)
  round 1.524 hole 0.94: 2(2.54,0)
KEY_4X4X1_5
  rect 1.626x1 smd: 1(-2.9,1.85) 2(2.9,1.85) 3(-2.9,-1.85) 4(2.9,-1.85)
L4_4X4_2
  rect 2.5x1.5 smd: 1(0,1.85) 2(0,-1.85)
L0603
  rect 0.762x0.762 smd: 1(-0.686,0) 2(0.686,0)
L1206
  rect 1.27x1.778 smd: 1(-1.524,0) 2(1.524,0)
LED0805
  rect 1.25x1.3 smd: 1(0,1) 2(0,-1)
LVS303010
  rect 3.023x1.016 smd: 1(0,-0.5) 2(0,2.5)
MARK
  round 1 smd: 1(0,0)
MICRO8
  oval 0.356x1.27 smd: 1(-0.975,-2.4) 2(-0.325,-2.4) 3(0.325,-2.4) 4(0.975,-2.4) 5(0.975,2.4) 6(0.325,2.4) 7(-0.325,2.4) 8(-0.975,2.4)
MICRO_SD
  rect 0.7x1.8 smd: 1(0,0) 2(-1.1,0) 3(-2.2,0) 4(-3.3,0) 5(-4.4,0) 6(-5.5,0) 7(-6.6,0) 8(-7.7,0) 9(-8.8,0)
  rect 1.6x1.5 smd: 10(4.6,-1.15)
  rect 1.2x1.8 smd: 11(-10,-1.4) 12(-10,-10.9) 13(5.5,-10.9)
MINI_HDMI
  rect 0.28x2.6 smd: 1(0,0) 2(-0.5,0) 3(-1,0) 4(-1.5,0) 5(-2,0) 6(-2.5,0) 7(-3,0) 8(-3.5,0) 9(-4,0) 10(-4.5,0) 11(-5,0) 12(-5.5,0) 13(-6,0) 14(-6.5,0) 15(-7,0) 16(-7.5,0) 17(-8,0) 18(-8.5,0) 19(-9,0)
  oval 1.524x3.3 hole 0.9x2.7: 20(-11.75,-0.73) 21(-11.75,-6.69) 22(2.75,-6.69) 23(2.75,-0.73)
MINI_USB_DIP
  round 1.2 hole 0.7: 1(-1.6,0.9) 2(-0.8,-0.3) 3(0,0.9) 4(0.8,-0.3) 5(1.6,0.9)
  oval 1.3x2.4 hole 0.8x1.9: 6(-3.7,0) 7(3.7,0) 8(-3.7,-4.75) 9(3.7,-4.75)
OSC3215
  rect 1x1.8 smd: 1(-1.25,0) 2(1.25,0)
OSC3225
  rect 1.397x1.194 smd: 1(-1.1,-0.85) 2(1.1,-0.85) 3(1.1,0.85) 4(-1.1,0.85)
PDSO-G6
  rect 0.4x0.9 smd: 1(-0.65,-1.1) 2(0,-1.1) 3(0.65,-1.1) 4(0.65,1.1) 5(0,1.1) 6(-0.65,1.1)
QFN24_RTW
  oval 1x0.25 smd: 1(-2,1.25) 2(-2,0.75) 3(-2,0.25) 4(-2,-0.25) 5(-2,-0.75) 6(-2,-1.25) 13(2,-1.25) 14(2,-0.75) 15(2,-0.25) 16(2,0.25) 17(2,0.75) 18(2,1.25)
  oval 0.25x1 smd: 7(-1.25,-2) 8(-0.75,-2) 9(-0.25,-2) 10(0.25,-2) 11(0.75,-2) 12(1.25,-2) 19(1.25,2) 20(0.75,2) 21(0.25,2) 22(-0.25,2) 23(-0.75,2) 24(-1.25,2)
  rect 2.45x2.45 smd: 25(0,0)
QFN40-5X5
  oval 0.8x0.2 smd: 1(0,4.3) 2(0,3.9) 3(0,3.5) 4(0,3.1) 5(0,2.7) 6(0,2.3) 7(0,1.9) 8(0,1.5) 9(0,1.1) 10(0,0.7) 21(5,0.7) 22(5,1.1) 23(5,1.5) 24(5,1.9) 25(5,2.3) 26(5,2.7) 27(5,3.1) 28(5,3.5) 29(5,3.9) 30(5,4.3)
  oval 0.2x0.8 smd: 11(0.7,0) 12(1.1,0) 13(1.5,0) 14(1.9,0) 15(2.3,0) 16(2.7,0) 17(3.1,0) 18(3.5,0) 19(3.9,0) 20(4.3,0) 31(4.3,5) 32(3.9,5) 33(3.5,5) 34(3.1,5) 35(2.7,5) 36(2.3,5) 37(1.9,5) 38(1.5,5) 39(1.1,5) 40(0.7,5)
  rect 3.4x3.4 smd: 41(2.5,2.5)
QFN-28
  rect 1x0.3 smd: 1(-2.43,1.5) 2(-2.43,1) 3(-2.43,0.5) 4(-2.43,0) 5(-2.43,-0.5) 6(-2.43,-1) 7(-2.43,-1.5) 15(2.43,-1.5) 16(2.43,-1) 17(2.43,-0.5) 18(2.43,0) 19(2.43,0.5) 20(2.43,1) 21(2.43,1.5)
  rect 0.3x1 smd: 8(-1.5,-2.43) 9(-1,-2.43) 10(-0.5,-2.43) 11(0,-2.43) 12(0.5,-2.43) 13(1,-2.43) 14(1.5,-2.43) 22(1.5,2.43) 23(1,2.43) 24(0.5,2.43) 25(0,2.43) 26(-0.5,2.43) 27(-1,2.43) 28(-1.5,2.43)
  rect 3.15x3.15 smd: 29(0,0)
  rect 0.508x0.508 smd: 30(-2.134,2.134)
R0402
  rect 0.508x0.508 smd: 1(-0.457,0) 2(0.457,0)
R0805
  rect 1.016x1.27 smd: 1(-0.965,0) 2(0.965,0)
R1206
  rect 1.27x1.778 smd: 1(-1.524,0) 2(1.524,0)
SMA_P
  round 2.54 hole 1.27: 1(0,0)
  round 2.54 hole 1.194: 2(-2.54,2.54) 3(2.54,2.54) 4(2.54,-2.54) 5(-2.54,-2.54)
SMAJ5
  rect 2.489x1.702 smd: 1(2,0) 2(-2,0)
SMBJ6-0CA
  rect 2.16x2.26 smd: 1(-2.45,0) 2(2.45,0)
SO8
  rect 1.524x0.61 smd: 1(0,0) 2(0,-1.27) 3(0,-2.54) 4(0,-3.81) 5(5.588,-3.81) 6(5.588,-2.54) 7(5.588,-1.27) 8(5.588,0)
SOD-123
  rect 0.8x0.8 smd: 1(-1.8,0) 2(1.8,0)
SOD-523
  rect 0.5x0.8 smd: 1(0,-0.8) 2(0,0.8)
SOT23
  rect 0.91x0.91 smd: 1(0,0) 2(1.9,0)
  rect 0.91x1.27 smd: 3(0.97,2.03)
SOT23-3
  rect 0.66x1.016 smd: 1(-0.965,-1.168) 2(0.935,-1.168) 3(-0.015,1.182)
SOT23-6
  rect 0.6x1.1 smd: 1(-0.95,-1.25) 2(0,-1.25) 3(0.95,-1.25) 4(0.95,1.25) 5(0,1.25) 6(-0.95,1.25)
SOT-23
  rect 1.397x1.016 smd: 1(0.986,-0.948) 2(0.986,0.952) 3(-1.006,0.002)
SOT-23-5
  rect 0.686x0.991 smd: 1(-0.95,-1.295) 2(0,-1.295) 3(0.95,-1.295) 4(0.95,1.295) 5(-0.95,1.295)
SS-12D11
  oval 1.508x2.008 hole 1x1.5: 1(-4.7,-5.5) 2(0,-5.5) 3(4.7,-5.5)
  oval 0.908x1.908 hole 0.4x1.4: 4(-6.5,3.7) 5(6.5,3.7)
TAN-SMB
  rect 1.5x2.5 smd: 1(1.4,0) 2(-1.4,0)
TCM811TERCTR
  rect 0.305x0.762 smd: 1(-0.953,-1.05) 2(0.953,-1.05) 3(0.953,1.05) 4(-0.953,1.05)
TPS2051BDBV
  rect 1x0.7 smd: 1(0,0) 2(0,-0.95) 3(0,-1.9) 4(2.6,-1.9) 5(2.6,0)
TS-026-3_3D8
  round 1.397 hole 0.914: 1(-1.5,0) 2(1.5,0) 3(0,2)
TSSOP8
  rect 0.254x1.295 smd: 1(-0.75,-1.412) 2(-0.25,-1.412) 3(0.25,-1.412) 4(0.75,-1.412) 5(0.75,1.412) 6(0.25,1.412) 7(-0.25,1.412) 8(-0.75,1.412)
unnamed
  round 1.016 smd: 1(0,0)
unnamed#2
  round 3.5 hole 2.1: 1(0,0)
USB3320C
  oval 0.711x0.254 smd: 1(-2.3,1.75) 2(-2.3,1.25) 3(-2.3,0.75) 4(-2.3,0.25) 5(-2.3,-0.25) 6(-2.3,-0.75) 7(-2.3,-1.25) 8(-2.3,-1.75) 17(2.3,-1.75) 18(2.3,-1.25) 19(2.3,-0.75) 20(2.3,-0.25) 21(2.3,0.25) 22(2.3,0.75) 23(2.3,1.25) 24(2.3,1.75)
  oval 0.254x0.711 smd: 9(-1.75,-2.3) 10(-1.25,-2.3) 11(-0.75,-2.3) 12(-0.25,-2.3) 13(0.25,-2.3) 14(0.75,-2.3) 15(1.25,-2.3) 16(1.75,-2.3) 25(1.75,2.3) 26(1.25,2.3) 27(0.75,2.3) 28(0.25,2.3) 29(-0.25,2.3) 30(-0.75,2.3) 31(-1.25,2.3) 32(-1.75,2.3)
  rect 3.3x3.3 smd: 33(0,0)
USB_TYPEA
  round 1.6 hole 0.92: 1(0,0) 2(2.5,0) 3(4.5,0) 4(7,0)
  round 3.3 hole 2.3: 5(-3.07,-2.71) 6(10.07,-2.71)

## Nets
GND: BT1.2 C1.2 C3.2 C6.1 C7.2 C8.1 C9.2 C10.2 C11.2 C12.2 C13.2 C14.2 C15.2 C16.2 C17.2 C18.2 C29.2 C30.2 C34.2 C37.2 C38.2 C39.2 C40.2 C41.2 C42.2 C43.1 C44.1 C45.1 C46.2 C47.2 C48.2 C49.2 C50.2 C51.2 C52.2 C53.2 C54.2 C55.2 C56.2 C57.2 C58.2 C59.2 C68.2 C69.2 C70.2 C71.2 C72.2 C73.2 C74.2 C75.2 C93.2 C94.2 C97.2 C101.2 C106.2 C109.2 C113.2 C119.2 C127.2 C151.2 C198.2 C200.2 C203.2 C204.2 C205.2 C214.1 C215.1 C280.2 C289.2 C290.2 C291.2 C292.2 C293.2 C294.2 C295.2 C296.2 C297.2 C298.2 C299.2 CN1.1 CN1.2 D1.1 D2.1 D3.1 D4.1 D5.3 D6.3 D7.1 D8.1 D10.1 D11.1 D12.1 D15.2(ANODE) D16.2(ANODE) HOLE1.1 HOLE2.1 HOLE3.1 HOLE4.1 J1.9(5) J1.10(65) J1.19(10) J1.20(70) J1.29(15) J1.30(75) J1.39(20) J1.40(80) J1.49(25) J1.50(85) J1.59(30) J1.60(90) J1.69(35) J1.70(95) J1.79(40) J1.80(100) J1.89(45) J1.90(105) J1.99(50) J1.100(110) J1.109(55) J1.110(115) J2.9(5) J2.10(65) J2.19(10) J2.20(70) J2.29(15) J2.30(75) J2.39(20) J2.40(80) J2.49(25) J2.50(85) J2.59(30) J2.60(90) J2.69(35) J2.70(95) J2.79(40) J2.80(100) J2.89(45) J2.90(105) J2.99(50) J2.100(110) J2.109(55) J2.110(115) J3.2 J3.10 J4.2(SHIELD1) J4.3(SHIELD2) J4.4(SHIELD3) J4.5(SHIELD4) J5.2(SHIELD1) J5.3(SHIELD2) J5.4(SHIELD3) J5.5(SHIELD4) J9.15(M1) J9.16(M2) J9.P10(CASE) J12.5(GND) J12.6(SH1) J12.7(SH2) J12.8(SH3) J12.9(SH4) J13.6(VSS) J13.10(GND#10) J13.11(GND#11) J13.12(GND#12) J13.13(GND#13) J15.4(GND) J15.5(SH2) J15.6(SH1) J19.2(D2S) J19.5(D1S) J19.8(D0S) J19.11(CLKS) J19.17(DDC/CECG) J20.1 J20.37 J20.38 J21.1 J21.37 J21.38 J22.2 J22.5 J22.8 J22.11 J22.14 J22.17 J22.20 J22.23 J22.26 J22.29 J22.32 J22.35 J22.38 J23.A1 J23.A4 J23.A7 J23.A10 J23.B1 J23.B4 J23.B7 J23.B10 J40.1 J40.4 KEY1.1(P1) KEY1.2(P2) KEY2.1(P1) KEY2.2(P2) KEY3.1(P1) KEY3.2(P2) KEY4.1(P1) KEY4.2(P2) Q1.2(EMITTER) Q2.2(EMITTER) Q5.2(SOURCE) R5.1 R12.2 R14.1 R23.2 R27.2 R29.1 R33.1 R39.1 R55.1 R57.1 R61.1 R64.1 R67.2 R72.1 R95.2 R96.2 R97.1 R109.2 R122.1 R127.2 R132.2 R238.2 R240.2 R241.1 R242.1 R246.1 R249.2 RST_KEY.2(B) RST_KEY.3(G) SW1.1(A1) SW1.2(A2) U1.1(GND) U2.2(GND) U3.2(GND) U4.5(GND) U5.3(GND) U6.2(GND) U7.2(GND1) U7.11(GND2) U7.25(EPAD) U8.41(EGND) U9.33(GND) U10.2(GND) U11.1(A0) U11.2(A1) U11.3(A2) U11.4(GND) U12.5(GND) U13.4(GND) U13.5(A2) U13.6(A1) U15.1(GND) U16.1(GND) U17.1(GND) U18.2(GND) U27.2(GND) U39.4(GND) U40.2(GND) X2.2(GND) Y1.2 Y1.4 Y2.2 Y2.4
VBAT_IN: BT1.1 U39.3(VBAT)
VCC1V8: C11.1 C17.1 C26.2 C30.1 C34.1 C39.1 C40.1 C41.1 C214.2 C297.1 L2.2 L6.1 R35.2 R36.1 R40.2 R58.2 R74.2 R148.2 R149.2 R247.1 TP2.1 U6.3(VCCA) U7.5(VCCA) U9.8(REFSEL0) U9.11(REFSEL1) U9.14(REFSEL2) U9.28(VDD18_2) U9.30(VDD18_1) U9.32(VDDIO) U27.3(VCCA) U27.6(OE)
VCC3V3: C1.1 C6.2 C7.1 C8.2 C9.1 C10.1 C12.1 C15.1 C16.1 C18.1 C37.1 C38.1 C50.1 C51.1 C52.1 C53.1 C54.1 C59.1 C72.1 C74.1 C97.1 C127.1 C194.2 C203.1 C204.1 C205.1 C215.2 C280.1 C289.1 D1.2 D2.2 D3.2 D4.2 J3.4 J3.6 J9.11(LD1_A) J13.4(VDD) J20.39 J20.40 J21.39 J21.40 J23.A15 J23.B15 L8.1 L11.2 LED1.1(ANODE) R1.1 R2.1 R9.1 R37.2 R38.2 R53.2 R63.1 R65.1 R66.1 R68.1 R70.2 R71.2 R73.2 R85.1 R86.1 R87.1 R88.1 R89.1 R90.1 R91.1 R92.1 R93.1 R98.1 R99.1 R112.2 R131.2 R180.1 R234.1 R235.1 R237.2 R250.1 R253.2 R254.1 TP3.1 U1.4(VDD) U2.3(VCC) U3.3(VCC) U4.8(VCC) U6.7(VCCB) U7.17(VCCB1) U7.21(VCCB0) U8.29(DVDD3V3) U9.21(VBAT) U11.8(VCC) U12.8(VCC) U13.8(VDD) U15.2(SREF) U27.7(VCCB) U39.8(VCC) U40.3(V+) X2.1(OE) X2.4(VDD)
VCC5V: C29.1 C46.1 C55.1 C58.1 C68.1 C71.1 C73.1 C200.1 C298.1 C299.1 D10.2 F1.1 J1.1 J1.2(61) J1.3(2) J1.4(62) J1.5(3) J1.6(63) J1.7(4) J1.8(64) J20.2 J21.2 J22.1 R126.1 R128.1 R179.1 R248.1 R252.1 U10.5(IN) U16.3(VIN) U17.3(VIN) U18.1(VIN) U40.5(IN-)
VCCIO_34: J1.11(6) J1.13(7) J1.15(8) J1.17(9) R68.2
VCCIO_35: C69.1 C70.1 J1.12(66) J1.14(67) J1.16(68) J1.18(69) J28.1 J29.1 R77.1 R78.1 R79.1 R80.1 R81.2 R82.2 R83.2 R84.2 R108.1 U18.5(VOUT)
485_A1: D7.2 J11.2 J40.2 U4.6(A)
485_A2: D12.2 J24.2 J40.5 U12.6(A)
485_B1: D8.2 J40.3 R32.1 U4.7(B)
485_B2: D11.2 J40.6 R94.1 U12.7(B)
485_DE1: J2.82(101) R33.2 U4.2(/RE) U4.3(DE)
485_DE2: J1.35(18) R97.2 U12.2(/RE) U12.3(DE)
485_RXD1: J2.84(102) U4.1(RO)
485_RXD2: J1.71(36) U12.1(RO)
485_TXD1: J2.112(116) U4.4(DI)
485_TXD2: J1.73(37) U12.4(DI)
CAM_CLK: J1.85(43) J23.A12 J23.B12
CAM_GPIO: J1.87(44) J23.A11 J23.B11
CAM_SCL: J1.93(47) J23.A13 J23.B13 R70.1
CAM_SDA: J1.91(46) J23.A14 J23.B14 R112.1
CAN0_CANH: D5.1 J8.1 J41.2 U2.7(CANH)
CAN0_CANL: D5.2 J41.1 R30.2 U2.6(CANL)
CAN0_RX: J2.76(98) U2.4(RXD)
CAN0_TX: J2.78(99) U2.1(TXD)
CAN1_CANH: D6.1 J10.1 J41.4 U3.7(CANH)
CAN1_CANL: D6.2 J41.3 R31.2 U3.6(CANL)
CAN1_RX: J2.92(106) U3.4(RXD)
CAN1_TX: J2.74(97) U3.1(TXD)
EPAD1: U5.29
EPAD2: U5.30
ETH_MDC: J2.102(111) U8.13(MDC)
ETH_MDIO: J2.118(119) R236.1 U8.14(MDIO)
ETH_RXCK: J2.61(31) R8.2
ETH_RXCTL: J2.63(32) R239.2
ETH_RXD0: J2.65(33) R259.2
ETH_RXD1: J2.67(34) R258.2
ETH_RXD2: J2.71(36) R257.2
ETH_RXD3: J2.73(37) R256.2
ETH_TXCK: J2.77(39) U8.20(TXC)
ETH_TXCTL: J2.75(38) U8.19(TXCTL)
ETH_TXD0: J2.87(44) U8.18(TXD0)
ETH_TXD1: J2.85(43) U8.17(TXD1)
ETH_TXD2: J2.83(42) U8.16(TXD2)
ETH_TXD3: J2.81(41) U8.15(TXD3)
FAN_PWM: J2.88(104) R181.1
FPGA_DONE: J1.118(119) LED2.1(ANODE) R73.1
FPGA_TCK: D1.3 J1.111(56) J3.1
FPGA_TDI: D4.3 J1.117(59) J3.9
FPGA_TDO: D2.3 J1.115(58) J3.3
FPGA_TMS: D3.3 J1.113(57) J3.5
HDMI_5V: C56.1 F1.2 J19.18(5V0) R100.1 R101.1 R102.1
HDMI_CEC: D9.1(CATHODE) J19.13(CEC)
HDMI_CLK_N: J1.38(79) J19.12(CLK-) R93.2
HDMI_CLK_P: J1.36(78) J19.10(CLK+) R92.2
HDMI_D0_N: J1.34(77) J19.9(D0-) R91.2
HDMI_D0_P: J1.32(76) J19.7(D0+) R90.2
HDMI_D1_N: J1.28(74) J19.6(D1-) R89.2
HDMI_D1_P: J1.26(73) J19.4(D1+) R88.2
HDMI_D2_N: J1.24(72) J19.3(D2-) R87.2
HDMI_D2_P: J1.22(71) J19.1(D2+) R86.2
HDMI_SCL: J1.42(81) R99.2 U15.3(S1)
HDMI_SCL_LS: J19.15(SCL) R101.2 U15.6(D1)
HDMI_SDA: J1.44(82) R98.2 U15.4(S2)
HDMI_SDA_LS: J19.16(SDA) R102.2 U15.5(D2)
I2C_SCL: R66.2 U11.6(SCL) U13.2(SCL) U27.8(B1) U39.6(SCL)
I2C_SCL_1V8: J2.62(91) R148.1 U27.5(A1)
I2C_SDA: R65.2 U11.5(SDA) U13.1(SDA) U27.1(B2) U39.5(SDA)
I2C_SDA_1V8: J2.104(112) R149.1 U27.4(A2)
IO1_1N: J1.76(98) J20.3
IO1_1P: J1.78(99) J20.4
IO1_2N: J1.72(96) J20.5
IO1_2P: J1.74(97) J20.6
IO1_3N: J1.66(93) J20.7
IO1_3P: J1.68(94) J20.8
IO1_4N: J1.75(38) J20.9
IO1_4P: J1.77(39) J20.10
IO1_5N: J1.62(91) J20.11
IO1_5P: J1.64(92) J20.12
IO1_6N: J1.56(88) J20.13
IO1_6P: J1.58(89) J20.14
IO1_7N: J1.61(31) J20.15
IO1_7P: J1.63(32) J20.16
IO1_8N: J1.65(33) J20.17
IO1_8P: J1.67(34) J20.18
IO1_9N: J1.52(86) J20.19
IO1_9P: J1.54(87) J20.20
IO1_10N: J1.46(83) J20.21
IO1_10P: J1.48(84) J20.22
IO1_11N: J1.55(28) J20.23
IO1_11P: J1.57(29) J20.24
IO1_12N: J1.51(26) J20.25
IO1_12P: J1.53(27) J20.26
IO1_13N: J1.45(23) J20.27
IO1_13P: J1.47(24) J20.28
IO1_14N: J1.41(21) J20.29
IO1_14P: J1.43(22) J20.30
IO1_15N: J1.31(16) J20.31
IO1_15P: J1.33(17) J20.32
IO1_16N: J1.25(13) J20.33
IO1_16P: J1.27(14) J20.34
IO1_17N: J1.21(11) J20.35
IO1_17P: J1.23(12) J20.36
IO2_1N: J2.23(12) J21.3 J22.40
IO2_1P: J2.21(11) J21.4 J22.39
IO2_2N: J2.13(7) J21.5 J22.37
IO2_2P: J2.11(6) J21.6 J22.36
IO2_3N: J2.17(9) J21.7 J22.34
IO2_3P: J2.15(8) J21.8 J22.33
IO2_4N: J2.3(2) J21.9 J22.31
IO2_4P: J2.1 J21.10 J22.30
IO2_5N: J2.7(4) J21.11 J22.28
IO2_5P: J2.5(3) J21.12 J22.27
IO2_6N: J2.25(13) J21.13 J22.25
IO2_6P: J2.27(14) J21.14 J22.24
IO2_7N: J2.18(69) J21.15 J22.22
IO2_7P: J2.16(68) J21.16 J22.21
IO2_8N: J2.22(71) J21.17 J22.19
IO2_8P: J2.24(72) J21.18 J22.18
IO2_9N: J2.26(73) J21.19 J22.16
IO2_9P: J2.28(74) J21.20 J22.15
IO2_10N: J2.31(16) J21.21 J22.13
IO2_10P: J2.33(17) J21.22 J22.12
IO2_11N: J2.32(76) J21.23 J22.10
IO2_11P: J2.34(77) J21.24 J22.9
IO2_12N: J2.36(78) J21.25 J22.7
IO2_12P: J2.38(79) J21.26 J22.6
IO2_13N: J2.35(18) J21.27 J22.4
IO2_13P: J2.37(19) J21.28 J22.3
IO2_14N: J2.41(21) J21.29
IO2_14P: J2.43(22) J21.30
IO2_15N: J2.45(23) J21.31
IO2_15P: J2.47(24) J21.32
IO2_16N: J2.51(26) J21.33
IO2_16P: J2.53(27) J21.34
IO2_17N: J2.55(28) J21.35
IO2_17P: J2.57(29) J21.36
IO13_L14N: J1.86(103)
IO13_L14P: J1.88(104)
IO13_L16N: J1.97(49)
IO13_L16P: J1.95(48)
IO13_L21N: J1.84(102)
IO13_L21P: J1.82(101)
IO13_L22N: J1.92(106)
IO13_L22P: J1.94(107)
KEY1: J2.58(89) KEY1.3(P3) KEY1.4(P4) R81.1
KEY2: J2.56(88) KEY2.3(P3) KEY2.4(P4) R82.1
KEY3: J2.54(87) KEY3.3(P3) KEY3.4(P4) R83.1
KEY4: J2.52(86) KEY4.3(P3) KEY4.4(P4) R84.1
LED1: J2.48(84) LED3.2(CATHODE)
LED2: J2.46(83) LED4.2(CATHODE)
LED3: J2.44(82) LED5.2(CATHODE)
LED4: J2.42(81) LED6.2(CATHODE)
LP_CLK_N: J1.98(109) R119.2
LP_CLK_P: J1.96(108) R121.2
LP_LANE0_N: J1.106(113) R113.2
LP_LANE0_P: J1.108(114) R115.2
LP_LANE1_N: J1.104(112) R118.2
LP_LANE1_P: J1.102(111) R120.2
MIPI_CLK_N: J1.83(42) J23.A8 J23.B8 R117.2 R119.1
MIPI_CLK_P: J1.81(41) J23.A9 J23.B9 R117.1 R121.1
MIPI_LAN0_N: J1.107(54) J23.A2 J23.B2 R113.1 R114.2
MIPI_LAN0_P: J1.105(53) J23.A3 J23.B3 R114.1 R115.1
MIPI_LAN1_N: J1.103(52) J23.A5 J23.B5 R116.2 R118.1
MIPI_LAN1_P: J1.101(51) J23.A6 J23.B6 R116.1 R120.1
OTG_CLK: J2.113(57) R59.1
OTG_D_N: J15.2(D-) U9.19(DM)
OTG_D_P: J15.3(D+) U9.18(DP)
OTG_DATA0: J2.107(54) U9.3(DATA0)
OTG_DATA1: J2.105(53) U9.4(DATA1)
OTG_DATA2: J2.103(52) U9.5(DATA2)
OTG_DATA3: J2.101(51) U9.6(DATA3)
OTG_DATA4: J2.97(49) U9.7(DATA4)
OTG_DATA5: J2.95(48) U9.9(DATA5)
OTG_DATA6: J2.93(47) U9.10(DATA6)
OTG_DATA7: J2.91(46) U9.13(DATA7)
OTG_DIR: J2.115(58) U9.31(DIR)
OTG_ID: R122.2 U9.23(ID)
OTG_NXT: J2.111(56) U9.2(NXT)
OTG_RESETN: C42.1 J2.66(93) R58.1 U9.27(RESETB)
OTG_STP: J2.117(59) U9.29(STP)
PHY_ADVDDL: C93.1 C106.1 C113.1 L9.2 U8.3(AVDDL1) U8.8(AVDDL2) U8.38(AVDDL3)
PHY_AVDD33: C94.1 C119.1 L8.2 U8.11(AVDD33_1) U8.40(AVDD33_2)
PHY_DVDDL: C293.1 C294.1 C295.1 L1.2 L9.1 U8.21(DVDDL)
PHY_ENB_LDO: R237.1 U8.32(LED0/ENB_LDO)
PHY_ETH_RXD2: R257.1 U8.23(RXD2)
PHY_INT_N: R235.2 U8.31(INTB/WOL)
PHY_IODVDD: C101.1 C109.1 L6.2 R15.2 R236.2 R243.2 R244.2 R245.2 U8.28(IODVDD)
PHY_LED1: J9.14(LD2_A) R238.1 U8.33(LED1/V_SEL0)
PHY_LED2: R53.1 R54.2 U8.34(LED2/V_SEL1)
PHY_MDI0_N: J9.P3(TRD0-) U8.2(MDI_A_N)
PHY_MDI0_P: J9.P2(TRD0+) U8.1(MDI_A_P)
PHY_MDI1_N: J9.P7(TRD1-) U8.5(MDI_B_N)
PHY_MDI1_P: J9.P4(TRD1+) U8.4(MDI_B_P)
PHY_MDI2_N: J9.P6(TRD2-) U8.7(MDI_C_N)
PHY_MDI2_P: J9.P5(TRD2+) U8.6(MDI_C_P)
PHY_MDI3_N: J9.P9(TRD3-) U8.10(MDI_D_N)
PHY_MDI3_P: J9.P8(TRD3+) U8.9(MDI_D_P)
PHY_REGOUT: L1.1 U8.30(REG_OUT)
PHY_RSET: R5.2 U8.39(RSET)
PHY_RXC_ADR1: R8.1 R55.2 U8.27(RXC/ADR1)
PHY_RXCTL_ADR2: R239.1 R246.2 U8.26(RXCTL/ADR2)
PHY_RXD0_RXDLY: R241.2 R244.1 R259.1 U8.25(RXD0/RXDLY)
PHY_RXD1_TXDLY: R242.2 R243.1 R258.1 U8.24(RXD1/TXDLY)
PHY_RXD3_ADR0: R245.1 R256.1 U8.22(RXD3/ADR0)
PL_GCLK1: J1.37(19) R69.1
PS_MIO8: J2.86(103)
PS_POR_B: D17.1(CATHODE) J1.116(118) R9.2 R255.1 U1.2(#RESET)
QSPI_D2_PS_MIO4: J2.120 R4.2
QSPI_D3_PS_MIO5: J2.119(60) R3.2
RTC_SQW: J2.72(96) R234.2 U39.7(SQW/OUT)
SD_CD: J2.94(107) R40.1 R41.2
SD_CLK: J2.106(113) U7.9(CLKA)
SD_CMD: J2.68(94) U7.4(CMDA)
SD_D0: J2.114(117) U7.6(DAT0A)
SD_D1: J2.116(118) U7.7(DAT1A)
SD_D2: J2.108(114) U7.1(DAT2A)
SD_D3: J2.64(92) U7.3(DAT3A)
SNS5V+: F2.2 R126.2 U40.4(IN+)
UART_RX: J2.98(109) R35.1 U6.5(A1)
UART_TX: J2.96(108) U6.4(A2)
USB2_5V: C47.1 C48.1 C49.1 J15.1(VCC) R62.1 U10.1(OUT)
USB_VBUS: R62.2 U9.22(VBUS)
VN: C2.2 J1.114(117) R13.2
VP: C2.1 J1.112(116) R11.2
VUSB_V_EN: R64.2 U9.17(CPEN) U10.4(EN)
XADC_AD1N: C5.2 J2.12(66) R28.2
XADC_AD1N_C: R14.2 R28.1
XADC_AD1P: C5.1 J2.14(67) R26.2
XADC_AD1P_C: R10.2 R12.1 R26.1
XADC_AD9N: C19.2 J2.8(64) R56.2
XADC_AD9N_C: R29.2 R56.1
XADC_AD9P: C19.1 J2.6(63) R50.2
XADC_AD9P_C: R25.2 R27.1 R50.1
XADC_AD12N: C20.2 J2.2(61) R130.2
XADC_AD12N_C: R57.2 R130.1
XADC_AD12P: C20.1 J2.4(62) R129.2
XADC_AD12P_C: R127.1 R128.2 R129.1
XADC_VN_C: C75.1 R13.1 R131.1 R132.1 U40.1(REF)
XADC_VP_C: R11.1 U40.6(OUT)
N16524379: J13.1(DAT2) U7.23(DAT2B0)
N16524383: J13.2(CD/DAT3) U7.22(DAT3B0)
N16524395: J13.3(CMD) R38.1 U7.20(CMDB0)
N16524421: J13.5(CLK) R37.1 U7.19(CLKB0)
N16524425: J13.7(DAT0) U7.18(DAT0B0)
N16524429: J13.8(DAT1) U7.16(DAT1B0)
N16546528: R39.2 U7.24(SEL)
N16579258: J13.9(CD) R41.1
N20328280: J12.1(VCC) U5.7(REGIN) U5.8(VBUS)
N20328299: J12.2(D-) U5.5(D-)
N20328339: J12.3(D+) U5.4(D+)
N20328351: R34.1 U5.9(R\S\T\)
N20328357: C13.1 C14.1 R34.2 U5.6(VDD)
N20328387: U5.26(TXD) U6.8(B1)
N20328389: U5.25(RXD) U6.1(B2)
N22251938: R61.2 U9.24(RBIAS)
N22262179: R59.2 U9.1(CLKOUT)
N27734784: C43.2 U9.20(VDD33)
N27740575: R63.2 U10.3(/OC)
N27764136: J19.19(HPD) R95.1
N27764548: J19.20(S1) J19.21(S3) J19.22(S2) J19.23(S4) R96.1
N27776434: CN1.3 SW8.2(COMMON)
N28081014: R67.1 U11.7(/WP)
N28082052: LED4.1(ANODE) R78.2
N28082069: LED5.1(ANODE) R79.2
N28082099: LED6.1(ANODE) R80.2
N28082146: LED3.1(ANODE) R77.2
N28092496: D9.2(ANODE) R85.2
N28094954: C57.1 R100.2 U15.7(DREF) U15.8(GREF)
N28290954: R254.2 R255.2 U18.3(EN)
N28363892: F2.1 SW8.1(NC)
N28375854: Q1.1(BASE) R74.1
N28376003: Q1.3(COLLECTOR) R75.1
N28376455: Q2.3(COLLECTOR) R76.1
N28424702: R71.1 R72.2 U13.7(A0)
N28427629: J8.2 R30.1
N28428666: J10.2 R31.1
N28434361: R1.2 R4.1 SW1.3(B2)
N28434367: R2.2 R3.1 SW1.4(B1)
N28435788: D16.1(CATHODE) J4.1(CENTER) R10.1
N28468739: C45.2 R60.1 U9.25(XO) Y2.3
N28468741: C44.2 R60.2 U9.26(REFCLK) Y2.1
N28489382: R108.2 R109.1 R110.1 R111.1 U18.4(ADJ)
N28489862: J28.2 R110.2
N28489865: J29.2 R111.2
N28494271: U39.2(X2) Y4.2
N28494275: U39.1(X1) Y4.1
N28497674: R69.2 X2.3(OUT)
N28529476: RST_KEY.1(A) U1.3(#MR)
N28580250: D15.1(CATHODE) J5.1(CENTER) R25.1
N28585555: D14.2(CATHODE) J14.1 R179.2
N28585561: D14.1(ANODE) J14.2 Q5.3(DRAIN2)
N28585800: Q5.1(GATE) R180.2 R181.2
N28677748: C291.1 U8.36(XI) Y1.1
N28677750: C290.1 U8.37(XO) Y1.3
N28677794: C3.1 C292.1 J9.P1(CT)
N28677883: C296.1 D17.2(ANODE) R15.1 U8.12(RSTN)
N28678506: J9.13(LD2_K) R240.1
N28678518: J9.12(LD1_K) R54.1
N28679809: C151.1 R248.2 U16.5(EN)
N28679836: C23.1 U16.6(BST)
N28679840: C23.2 L2.1 U16.2(SW)
N28679880: C26.1 R23.1 R247.2 U16.4(FB)
N28680813: C198.1 R252.2 U17.5(EN)
N28680823: C209.1 U17.6(BST)
N28680839: C209.2 L11.1 U17.2(SW)
N28680865: C194.1 R249.1 R250.2 U17.4(FB)
N28681792: Q2.1(BASE) R253.1
N280825631: LED2.2(CATHODE) R76.2
N280826011: LED1.2(CATHODE) R75.2
N284238051: R36.2 U6.6(OE)
N284307801: J11.1 R32.2
N285447041: J24.1 R94.2

Pads without a net: BT1 3 4; J1 119 120; J3 7 8; J12 4; J19 14; J22 41 42; J23 P2; NOREF 1; NOREF#2 1; NOREF#3 1; NOREF#4 1; NOREF#5 1; NOREF#6 1; NOREF#7 1; NOREF#9 1; NOREF#10 1; NOREF#11 1; NOREF#12 1; NOREF#13 1; SW8 3 4 5; U2 5 8; U3 5 8; U5 1 2 10 11 12 13 14 15 16 17 18 19 20 21 22 23 24 27 28; U7 8 10 12 13 14 15; U8 35; U9 12 15 16; U13 3

## Via types
v1: diameter 0.406, hole 0.203, TOP to BOTTOM, 156 vias
v2: diameter 0.483, hole 0.305, TOP to BOTTOM, 492 vias

## Routing (per net, layer and track width the routed paths; a pad name or vN(x,y) marks a point on that pad's centre or on a via; arc(x,y) is an arc through that point)
GND: length 492.3
  TOP w0.254: J1.90 v2(67.36,55.54) ; v2(64,70.36) 63.81,70.54 J1.29 ; J1.100 v2(64.07,53.04) J1.99 ; J2.29 35.94,70.65 36.08,70.51 v2(36.11,70.51) 36.13,70.51 36.27,70.65 J2.30 ; J2.40 36.34,68.15 v2(36.16,67.97) 35.98,68.15 J2.39 ; v1(28.44,75.02) 28.66,74.8 C294.2 v1(28.19,74.52) ; v2(67.27,65.23) 66.96,65.54 J1.50 ; C290.2 v1(21.86,70.15) ; J1.79 v2(64.02,58.04) ; R127.2 45.62,79.45 v1(45.47,79.59) ; v1(27.15,75.87) C293.2 v1(26.28,75.25) ; v1(11.97,25.5) C14.2 v1(12.59,24.86) ; v1(87.91,101.77) KEY3.2 v1(87.17,100.69) ; v2(59.75,62.66) 59.75,62.71 60.31,63.27 60.95,63.27 61.18,63.04 J1.59 ; J2.100 39.19,53.15 v2(39.51,52.83) ; J1.10 v2(67.65,75.54) ; J19.8 v2(82.25,70.17) ; v1(21.75,69.41) 21.87,69.29 R5.1 ; C203.2 v1(49.48,18.7) ; C75.2 v1(66.17,37.46) ; C151.2 v2(43.19,15.76) ; J19.2 v2(82.32,73.17) ; J1.39 61.11,68.04 v2(60.69,68.45) ; v2(67.45,57.53) 66.94,58.04 J1.80 ; v2(38.64,19.31) 38.88,19.07 U16.1 v2(38.09,18.76) ; J1.70 67,60.54 v2(67.37,60.17) ; J2.9 35.97,75.65 v2(36.16,75.46) 36.35,75.65 J2.10 ; v2(24.75,28.04) 24.91,28.2 U6.2 ; v1(22.1,59.89) 21.47,60.52 C296.2 v1(20.41,60.64) ; J2.89 v2(36.23,55.65) J2.90 ; J1.89 v2(64.08,55.54) ; v1(69.57,104.71) 69.77,104.51 C18.2 ; v1(29.94,67.69) 29.67,67.42 C97.2 ; J19.5 v2(82.22,71.67) ; J1.49 60.86,65.54 60.67,65.36 v2(60.64,65.36) ; J19.11 v2(82.24,68.67) ; v2(67.35,62.69) 66.99,63.04 J1.60 ; C200.2 v2(50.28,18.64) ; v2(60.16,75.74) 60.36,75.54 J1.9 ; v1(18.87,75.65) C292.2 v1(18.38,76.18) ; v2(53.03,19.42) 53.27,19.18 U17.1 ; v1(70.54,112.91) C15.2 69.83,112.06 v1(69.62,112.27) ; J2.80 36.53,58.15 v2(36.16,58.52) 35.79,58.15 J2.79 ; C198.2 57.58,16.18 v2(57.87,15.89) ; J1.69 60.53,60.54 v2(60.41,60.66) ; v1(22.75,73.91) Y1.2 v1(21.79,73.12) ; v1(87.17,106.47) KEY3.1 v1(87.86,107.57) ; J1.40 v2(69.45,68.04) ; J2.110 v2(36.2,50.65) J2.109 ; 25.44,71.42 25.55,71.42 v1(25.88,71.09) ; 25.44,71.42 v1(25.84,71.82) ; 25.44,71.42 Y1.4 ; v2(70.97,26.03) C73.2 v2(71.66,26.72) ; v1(72.47,64.12) 72.65,63.94 X2.2 72.23,63.29 v1(71.78,63.74) ; J19.17 v2(82.14,65.67) ; C291.2 v1(25.12,70.56) ; R27.2 v1(70.67,91.72) ; v1(12.16,26.67) C13.2 v1(12.67,27.17) ; J2.50 36.25,65.65 36.13,65.53 v2(36.11,65.53) 35.99,65.65 J2.49 ; J2.69 35.78,60.65 v2(36.13,60.3) 36.33,60.3 36.69,60.65 J2.70 ; U40.2 v1(67.12,37.92) ; R249.2 v2(56.31,14.52) ; J1.109 63.56,50.54 63.69,50.67 64.15,50.67 v2(64.17,50.7) 64.33,50.54 J1.110 ; C295.2 v2(28.56,60.78) ; v2(64.07,72.95) 63.98,73.04 J1.19 ; J1.20 v2(67.33,73.04) ; v2(25.64,39.35) 25.59,39.35 25.57,39.37 C44.1 ; R29.1 v1(70.62,90.88) ; R132.2 v1(64.44,37.47) ; v1(17.09,75.65) C3.2 v1(17.55,76.17) ; J2.19 35.95,73.15 v2(36.11,73) 36.26,73.15 J2.20 ; R23.2 v2(41.37,13.88) ; C29.2 v2(35.89,18.53) ; U5.3 v2(13.78,31.61) ; C16.2 v1(69.45,105.69) ; J2.59 36.1,63.15 36.18,63.07 v2(36.28,63.07) 36.37,63.15 J2.60 ; J1.30 v2(67.37,70.54) ; J2.99 v2(32.74,53.15) ; R57.1 v1(43.02,79.55) ; C74.2 v1(66.69,36.25)
  TOP w0.381: U13.4 v2(42.98,36.64) ; v1(87.95,87.82) KEY1.1 v1(87.17,86.76) ; v1(87.89,91.89) KEY2.2 v1(87.17,90.83) ; v1(87.17,96.66) KEY2.1 v1(87.94,97.69) ; v1(87.89,111.64) KEY4.2 v1(87.17,110.53) ; v1(72.43,28.04) D10.1 v1(73.96,29.21) ; v1(87.86,117.44) KEY4.1 v1(87.17,116.32) ; U13.6 36.09,35.99 v2(35.65,36.43) 35.86,36.64 U13.5 ; v2(77.1,66.19) 76.66,65.75 C280.2 ; v1(87.94,82.02) KEY1.2 v1(87.17,80.94)
  TOP w0.508: v2(42.79,91.72) 42.74,91.77 SW1.2 ; v2(29.52,110.33) BT1.2 v2(31.72,112.13) ; v2(24.63,36.23) 23.88,36.23 23.33,36.78 Y2.4 23.68,37.14 v2(24.6,37.14) ; J23.A7 v2(56.22,36.02) ; C12.2 23.53,34.65 v2(23.23,34.95) ; R122.1 16.6,40.29 v2(16.73,40.16) ; D7.1 v2(19.29,99.29) ; U18.2 50.46,88.2 50.93,87.73 v2(52.21,87.73) ; C9.2 v2(25.51,113.34) ; C53.2 v2(25.39,80.85) ; C57.2 v2(74.21,59.34) ; C11.2 v2(26.17,26.34) ; J23.A4 v2(59.22,35.97) ; C37.2 v2(15.63,43.19) ; v2(52.84,36.07) 53.22,35.69 J23.A10 ; C1.2 v2(7.76,8.84) ; C6.1 24.14,107.34 v2(24.6,106.88) ; v2(33.52,97.74) 33.24,98.02 R33.1 ; C51.2 C72.2 48.53,40.21 v2(48.27,40.46) ; C49.2 v2(18.63,48.36) ; R95.2 v2(74.13,65.81) ; Y2.2 v2(20.06,38.48) ; R97.1 v2(33.77,86.16) ; C54.2 v2(75.43,46.41) ; R72.1 v2(33.06,35.56) ; U15.1 v2(74.46,51.97) ; C45.1 v2(17.51,36.81) ; U2.2 v2(19.33,113.53) ; J23.A1 v2(62.22,35.76) ; R109.2 v2(52.24,90.81) ; D8.1 v2(19.22,94.34) ; U4.5 v2(25.59,99.32) ; C69.2 47.71,89.43 v2(48.37,88.77) 48.6,88.55 C68.2 ; C70.2 51.02,93.3 v2(51.04,93.27) ; U12.5 v2(25.72,87.45) ; U11.1 v2(35.44,30.95) ; J23.B7 v2(56.22,32.43) ; R61.1 19.19,37.59 v2(19.15,37.55) ; v2(52.84,32.18) 53.22,31.81 J23.B10 ; U39.4 v2(55.11,105.56) ; C52.2 v2(33.16,34.55) ; C289.2 v2(60.31,112.32) ; C8.1 v2(24.83,114.83) ; U11.3 v2(35.24,28.41) ; v2(43.07,91.04) 42.53,90.5 SW1.1 ; U11.4 v2(35.24,27.14) ; D11.1 v2(19.34,82.48) ; U1.1 v2(9.79,11.69) ; C43.1 v2(15.58,44.5) ; J23.B1 v2(62.22,32) ; C10.2 v2(25.26,92.74) ; J23.B4 v2(59.22,32.26) ; D12.1 v2(19.42,87.43) ; U11.2 v2(35.29,29.68) ; R67.2 C50.2 v2(42.96,30.94) ; U3.2 v2(19.32,106.01) ; C7.2 v2(25.26,105.96)
  L2_GND w0.381: J40.4 9.03,86.85 ; J5.2 74.02,91.16 ; J5.5 79.1,91.16 ; J15.5 11.45,51.1 ; J40.1 9.03,98.28 ; J5.4 79.1,96.24 ; J15.6 11.45,37.96 ; J5.3 74.02,96.24
  L5_GND w0.381: J5.2 74.02,91.16 ; J15.5 11.45,51.1 ; J15.6 11.45,37.96 ; J5.5 79.1,91.16 ; J40.4 9.03,86.85 ; J5.4 79.1,96.24 ; J5.3 74.02,96.24 ; J40.1 9.03,98.28
  BOTTOM w0.203: v1(23.26,63.77) 24.04,63.77 ; v1(23.26,63.77) 23.26,63.99 ; v1(23.26,63.77) 23.26,63.56 ; v1(23.26,63.77) 23.05,63.77 ; 25.66,75.25 v1(26.28,75.25) ; v1(26.28,75.25) 26.28,75.63 ; v1(26.28,75.25) 26.47,75.25 ; v1(26.28,75.25) 26.28,75.05 ; v1(87.17,110.53) 87.17,110.8 ; v1(87.17,110.53) 87.91,110.53 ; v1(87.17,110.53) 87.17,110.29 ; v1(87.17,110.53) 86.93,110.53 ; J13.10 75.14,103.8 ; J13.10 75.8,103.55 ; J13.10 74.89,103.55 ; J13.10 75.14,103.21 ; v2(83.14,43.7) 83.35,43.7 ; v2(83.14,43.7) 83.14,43.92 ; v2(83.14,43.7) 83.14,43.4 ; 69.39,83.97 R12.2 ; R12.2 69.63,84.21 ; R12.2 70.24,83.97 ; v2(19.22,94.34) 19.41,94.34 ; v2(19.22,94.34) 18.64,94.34 ; v2(19.22,94.34) 19.22,94.14 ; v2(19.22,94.34) 19.22,94.76 ; 26.01,39.69 C42.2 ; C42.2 26.01,40.59 ; C42.2 25.77,40.35 ; v2(70.85,67.77) 70.85,68.27 ; v2(70.85,67.77) 70.85,67.33 ; v2(70.85,67.77) 70.35,67.77 ; v2(70.85,67.77) 71.29,67.77 ; 24.06,63.77 v1(24.53,63.77) ; v1(24.53,63.77) 24.53,64.25 ; v1(24.53,63.77) 24.53,63.52 ; v1(24.53,63.77) 25.05,63.77 ; 55.84,36.02 v2(56.22,36.02) ; v2(56.22,36.02) 56.22,36.6 ; v2(56.22,36.02) 56.64,36.02 ; v2(56.22,36.02) 56.22,35.63 ; J13.12 84.89,118.58 ; J13.12 85.34,118.15 ; J13.12 84.46,118.15 ; J13.12 84.89,117.6 ; 72.56,86.13 J4.3 ; J4.3 72.56,86.68 ; J4.3 71.88,86.46 ; J4.3 72.78,86.46 ; v2(62.22,32) 62.22,32.54 ; v2(62.22,32) 62.22,31.64 ; v2(62.22,32) 61.86,32 ; v2(62.22,32) 62.41,32 ; v2(35.24,27.14) 35.24,27.45 ; v2(35.24,27.14) 35.55,27.14 ; v2(35.24,27.14) 34.68,27.14 ; v2(35.24,27.14) 35.24,26.68 ; v1(87.91,101.77) 87.91,102.49 ; v1(87.91,101.77) 87.64,101.77 ; v1(87.91,101.77) 88.2,101.77 ; v1(87.91,101.77) 87.91,101.5 ; 33.52,97.56 v2(33.52,97.74) ; v2(33.52,97.74) 33.88,97.74 ; v2(33.52,97.74) 33.52,98.38 ; v2(33.52,97.74) 33.34,97.74 ; 82.03,70.17 v2(82.25,70.17) ; v2(82.25,70.17) 82.25,70.68 ; v2(82.25,70.17) 82.25,69.95 ; v2(82.25,70.17) 82.74,70.17 ; v2(49.09,18.02) 49.7,18.02 ; v2(49.09,18.02) 49.09,17.61 ; v2(49.09,18.02) 49.09,18.41 ; v2(49.09,18.02) 48.84,18.02 ; C40.2 23.93,49.57 ; C40.2 23.6,49.14 ; C40.2 23.93,48.81 ; v2(43.19,15.76) 43.43,15.76 ; v2(43.19,15.76) 42.9,15.76 ; v2(43.19,15.76) 43.19,15.52 ; v2(43.19,15.76) 43.19,16.48 ; 65.4,102.11 v2(65.57,102.11) ; v2(65.57,102.11) 66.18,102.11 ; v2(65.57,102.11) 65.57,102.28 ; v2(65.57,102.11) 65.57,101.71 ; 6.82,98.11 J40.1 ; J40.1 6.82,98.84 ; J40.1 7.26,98.28 ; J40.1 6.65,98.28 ; 24.84,66 C109.2 ; C109.2 25.05,66.78 ; C109.2 25.27,66 ; C109.2 25.05,65.8 ; 70.46,99.12 R39.1 ; R39.1 70.46,99.84 ; R39.1 70.66,99.64 ; R39.1 69.98,99.64 ; 15.34,59.09 J9.P10 ; J9.P10 14.51,59.23 ; J9.P10 15.34,59.41 ; J9.P10 15.49,59.23 ; J12.5 7.5,26.02 ; J12.5 7.02,25.63 ; J12.5 7.89,25.63 ; J12.5 7.5,25.1 ; 38.34,19.31 v2(38.64,19.31) ; v2(38.64,19.31) 38.64,19.75 ; v2(38.64,19.31) 38.64,19.03 ; v2(38.64,19.31) 38.86,19.31 ; 10.06,21.62 v2(10.66,21.62) ; v2(10.66,21.62) 10.66,21.21 ; v2(10.66,21.62) 10.66,21.85 ; v2(10.66,21.62) 10.89,21.62 ; 68.98,105.69 v1(69.45,105.69) ; v1(69.45,105.69) 69.45,105.15 ; v1(69.45,105.69) 69.64,105.69 ; v1(69.45,105.69) 69.45,105.88 ; v2(19.32,106.01) 20.02,106.01 ; v2(19.32,106.01) 19.32,106.32 ; v2(19.32,106.01) 19.32,105.72 ; v2(19.32,106.01) 19.03,106.01 ; 81.42,43.7 D3.1 ; D3.1 81.98,44.07 ; D3.1 81.98,43.25 ; D5.3 3.52,115.49 ; D5.3 3.9,115.1 ; D5.3 2.96,115.1 ; 23.18,44.53 v2(23.39,44.53) ; v2(23.39,44.53) 23.91,44.53 ; v2(23.39,44.53) 23.39,44.32 ; v2(23.39,44.53) 23.39,45.01 ; HOLE3.1 86.42,4.42 ; HOLE3.1 86.42,3.44 ; HOLE3.1 86.62,3.63 ; HOLE3.1 86.21,3.63 ; v2(36.16,58.52) 36.34,58.52 ; v2(36.16,58.52) 36.16,58.25 ; v2(36.16,58.52) 36.16,58.71 ; v2(36.16,58.52) 35.9,58.52 ; v2(3.52,114.28) 3.72,114.28 ; v2(3.52,114.28) 3.15,114.28 ; v2(3.52,114.28) 3.52,113.65 ; v2(67.37,70.54) 67.57,70.54 ; v2(67.37,70.54) 67.37,70.75 ; v2(67.37,70.54) 67.03,70.54 ; v2(67.37,70.54) 67.37,69.88 ; 25.39,80.54 v2(25.39,80.85) ; v2(25.39,80.85) 25.25,80.85 ; v2(25.39,80.85) 25.83,80.85 ; v2(25.39,80.85) 25.39,81.2 ; 70.37,90.88 v1(70.62,90.88) ; v1(70.62,90.88) 71.27,90.88 ; v1(70.62,90.88) 70.62,90.63 ; v1(70.62,90.88) 70.62,91.24 ; v1(24.37,66.3) 24.54,66.3 ; v1(24.37,66.3) 24.37,66.11 ; v1(24.37,66.3) 23.56,66.3 ; v1(24.37,66.3) 24.37,66.47 ; 22.67,65.19 v1(23.29,65.19) ; v1(23.29,65.19) 23.29,65.55 ; v1(23.29,65.19) 23.45,65.19 ; v1(23.29,65.19) 23.29,65.02 ; v2(6.58,17.43) 6.58,17.88 ; v2(6.58,17.43) 6.58,17.14 ; v2(6.58,17.43) 6.88,17.43 ; v2(6.58,17.43) 6.02,17.43 ; v1(72.43,28.04) 72.43,28.48 ; v1(72.43,28.04) 71.85,28.04 ; v1(72.43,28.04) 72.43,27.66 ; v1(72.43,28.04) 72.8,28.04 ; 23.17,45.8 v2(23.39,45.8) ; v2(23.39,45.8) 23.39,46.01 ; v2(23.39,45.8) 23.39,45.33 ; v2(23.39,45.8) 23.93,45.8 ; 13.01,31.61 v2(13.78,31.61) ; v2(13.78,31.61) 13.78,31.8 ; v2(13.78,31.61) 13.78,31.38 ; v2(13.78,31.61) 13.98,31.61 ; 36.13,59.76 v2(36.13,60.3) ; v2(36.13,60.3) 36.58,60.3 ; v2(36.13,60.3) 35.66,60.3 ; v2(36.13,60.3) 36.13,60.75 ; 22.12,42.73 v2(22.12,43.26) ; v2(22.12,43.26) 21.64,43.26 ; v2(22.12,43.26) 22.12,43.58 ; v2(22.12,43.26) 22.44,43.26 ; D15.2 67.89,86.32 ; D15.2 68.05,86.16 ; D15.2 67.89,85.49 ; D15.2 67.56,86.16 ; v2(82.32,73.17) 82.32,73.77 ; v2(82.32,73.17) 82.05,73.17 ; v2(82.32,73.17) 82.32,72.89 ; v2(82.32,73.17) 82.73,73.17 ; 21.86,69.99 v1(21.86,70.15) ; v1(21.86,70.15) 21.7,70.15 ; v1(21.86,70.15) 21.86,70.64 ; v1(21.86,70.15) 22.26,70.15 ; v1(87.17,90.83) 87.17,91.18 ; v1(87.17,90.83) 87.17,90.68 ; v1(87.17,90.83) 86.51,90.83 ; v1(87.17,90.83) 87.31,90.83 ; 7.67,62.43 R240.2 ; R240.2 8.03,62.7 ; R240.2 8.03,61.83 ; 23.26,66.11 v1(23.26,66.31) 23.46,66.31 ; 29.63,64.33 R241.1 ; R241.1 29.25,64.68 ; R241.1 29.98,64.68 ; R241.1 29.63,65.24 ; v2(17.51,36.81) 17.51,36.95 ; v2(17.51,36.81) 17.2,36.81 ; v2(17.51,36.81) 17.51,36.12 ; v2(17.51,36.81) 17.66,36.81 ; v1(43.02,79.55) 43.48,79.55 ; v1(43.02,79.55) 42.85,79.55 ; v1(43.02,79.55) 43.02,79.72 ; v1(43.02,79.55) 43.02,79.01 ; 69.72,89.52 D16.2 ; D16.2 69.45,89.79 ; D16.2 69.72,90.34 ; D16.2 70.18,89.79 ; v2(67.21,96.29) 67.33,96.29 ; v2(67.21,96.29) 67.21,96.05 ; v2(67.21,96.29) 67.21,96.76 ; v2(67.21,96.29) 66.97,96.29 ; 72.47,63.91 v1(72.47,64.12) ; v1(72.47,64.12) 72.68,64.12 ; v1(72.47,64.12) 72.47,64.64 ; v1(72.47,64.12) 71.98,64.12 ; v2(16.73,40.16) 17.5,40.16 ; v2(16.73,40.16) 16.73,40.36 ; v2(16.73,40.16) 16.53,40.16 ; v2(16.73,40.16) 16.73,39.92 ; 24.81,70.56 v1(25.12,70.56) ; v1(25.12,70.56) 25.12,70.75 ; v1(25.12,70.56) 25.12,69.88 ; v1(25.12,70.56) 25.31,70.56 ; J9.16 12.45,57.2 ; J9.16 12.04,56.79 ; J9.16 12.04,57.68 ; J9.16 11.52,57.2 ; v2(73.27,5.03) 73.27,5.37 ; v2(73.27,5.03) 73.74,5.03 ; v2(73.27,5.03) 73.27,4.5 ; 5.96,23.53 J12.7 ; J12.7 6.6,23.9 ; J12.7 6.94,23.53 ; J12.7 6.6,23.19 ; 82.84,57.29 v2(82.84,57.77) ; v2(82.84,57.77) 82.84,58.2 ; v2(82.84,57.77) 83.36,57.77 ; 87.17,106.27 v1(87.17,106.47) ; v1(87.17,106.47) 87.87,106.47 ; v1(87.17,106.47) 86.96,106.47 ; v1(87.17,106.47) 87.17,106.77 ; 67.27,64.81 v2(67.27,65.23) ; v2(67.27,65.23) 67.75,65.23 ; v2(67.27,65.23) 66.85,65.23 ; v2(67.27,65.23) 67.27,65.38 ; 14.15,20.37 v2(14.64,20.37) ; v2(14.64,20.37) 14.64,20.88 ; v2(14.64,20.37) 14.85,20.37 ; v2(14.64,20.37) 14.64,20.17 ; v1(87.94,97.69) 88.14,97.69 ; v1(87.94,97.69) 87.94,97.49 ; v1(87.94,97.69) 87.94,98.45 ; v1(87.94,97.69) 87.69,97.69 ; Q2.2 42.65,86.41 ; Q2.2 41.66,86.41 ; Q2.2 42.39,86.68 ; v2(56.22,32.43) 56.4,32.43 ; v2(56.22,32.43) 56.22,32.58 ; v2(56.22,32.43) 56.22,32.02 ; v2(56.22,32.43) 56.08,32.43 ; 28.56,60.27 v2(28.56,60.78) ; v2(28.56,60.78) 28.09,60.78 ; v2(28.56,60.78) 28.56,61.24 ; v2(28.56,60.78) 29.06,60.78 ; J20.1 68.71,7.85 ; J20.1 68.36,7.5 ; J20.1 69.26,7.5 ; J20.1 68.71,7.05 ; 87.18,43.42 J3.10 ; J3.10 87.18,43.9 ; J3.10 87.33,43.57 ; J3.10 86.5,43.57 ; 11.48,23.04 v2(12.13,23.04) ; v2(12.13,23.04) 12.48,23.04 ; v2(12.13,23.04) 12.13,22.68 ; v2(12.13,23.04) 12.13,23.4 ; v2(24.66,44.53) 24.92,44.53 ; v2(24.66,44.53) 24.66,44.27 ; v2(24.66,44.53) 24.66,45.07 ; v2(24.66,44.53) 24.19,44.53 ; 35.65,36.15 v2(35.65,36.43) ; v2(35.65,36.43) 35.93,36.43 ; v2(35.65,36.43) 35.31,36.43 ; v2(35.65,36.43) 35.65,37.09 ; RST_KEY.2 2.81,16.38 ; RST_KEY.2 3.25,16.18 ; RST_KEY.2 2.81,15.62 ; RST_KEY.2 2.61,16.18 ; 67.33,72.86 v2(67.33,73.04) ; v2(67.33,73.04) 67.09,73.04 ; v2(67.33,73.04) 67.33,73.8 ; v2(67.33,73.04) 67.52,73.04 ; J12.8 1.85,31.52 ; J12.8 1.85,30.66 ; J12.8 1.58,30.93 ; J12.8 2.27,30.93 ; v2(65.57,103.1) 65.57,103.28 ; v2(65.57,103.1) 65.57,102.72 ; v2(65.57,103.1) 66.2,103.1 ; v2(65.57,103.1) 65.39,103.1 ; 15.58,44.24 v2(15.58,44.5) ; v2(15.58,44.5) 15.58,45.09 ; v2(15.58,44.5) 15.33,44.5 ; v2(15.58,44.5) 15.84,44.5 ; v2(24.66,45.8) 24.93,45.8 ; v2(24.66,45.8) 24.18,45.8 ; v2(24.66,45.8) 24.66,46.07 ; v2(24.66,45.8) 24.66,45.27 ; 72.05,62.59 C55.2 ; C55.2 72.23,62.87 ; C55.2 71.42,62.87 ; v2(29.52,110.33) 29.52,110.48 ; v2(29.52,110.33) 29.8,110.33 ; v2(29.52,110.33) 29.52,109.61 ; v2(29.52,110.33) 29.37,110.33 ; 30.18,67.69 v1(29.94,67.69) 29.94,67.43 ; 64,70.1 v2(64,70.36) ; v2(64,70.36) 64.74,70.36 ; v2(64,70.36) 64,70.48 ; v2(64,70.36) 63.83,70.36 ; v2(42.79,91.72) 42.79,92.31 ; v2(42.79,91.72) 42.79,91.56 ; v2(42.79,91.72) 42.37,91.72 ; v2(42.79,91.72) 42.95,91.72 ; v2(25.51,113.34) 25.79,113.34 ; v2(25.51,113.34) 25.51,113.51 ; v2(25.51,113.34) 25.51,112.61 ; v2(25.51,113.34) 25.33,113.34 ; v1(87.95,87.82) 88.33,87.82 ; v1(87.95,87.82) 87.51,87.82 ; v1(87.95,87.82) 87.95,87.44 ; v1(87.95,87.82) 87.95,88.39 ; 24.75,27.87 v2(24.75,28.04) ; v2(24.75,28.04) 24.58,28.04 ; v2(24.75,28.04) 25.53,28.04 ; v2(24.75,28.04) 24.75,28.27 ; v2(59.22,35.97) 59.22,36.58 ; v2(59.22,35.97) 59.06,35.97 ; v2(59.22,35.97) 59.61,35.97 ; v2(59.22,35.97) 59.22,35.65 ; v1(24.53,65.04) 24.8,65.04 ; v1(24.53,65.04) 24.31,65.04 ; v1(24.53,65.04) 24.53,64.3 ; v1(24.53,65.04) 24.53,65.26 ; v2(21.89,49.14) 21.89,49.55 ; v2(21.89,49.14) 21.89,48.83 ; v2(21.89,49.14) 21.59,49.14 ; v2(24.6,106.88) 24.6,107.48 ; v2(24.6,106.88) 24.19,106.88 ; v2(24.6,106.88) 24.6,106.57 ; v2(24.6,106.88) 24.92,106.88 ; 45.69,18.02 v2(46.39,18.02) ; v2(46.39,18.02) 46.67,18.02 ; v2(46.39,18.02) 46.39,17.72 ; v2(46.39,18.02) 46.39,18.3 ; v2(36.16,75.46) 36.16,75.6 ; v2(36.16,75.46) 36.16,74.88 ; v2(36.16,75.46) 36.5,75.46 ; v2(36.16,75.46) 35.74,75.46 ; J4.2 72.56,81.65 ; J4.2 72.56,81.1 ; J4.2 71.83,81.38 ; J4.2 72.83,81.38 ; R242.1 29.63,64.23 ; R242.1 29.63,63.32 ; R242.1 29.25,63.85 ; R242.1 30.01,63.85 ; 29.36,65.51 R246.1 ; R246.1 29.63,66.24 ; R246.1 29.81,65.51 ; R246.1 29.63,65.33 ; R64.1 23.91,30.46 ; R64.1 23.69,30.95 ; R64.1 23.31,30.46 ; 3.5,3.86 HOLE2.1 ; HOLE2.1 4.37,3.86 ; HOLE2.1 3.77,4.27 ; HOLE2.1 3.77,3.59 ; 77.64,86.18 J4.4 ; J4.4 76.91,86.46 ; J4.4 77.64,86.63 ; J4.4 77.8,86.46 ; 81.41,57.77 D1.1 ; D1.1 81.9,58.23 ; D1.1 81.9,57.25 ; v2(23.69,29.74) 23.89,29.74 ; v2(23.69,29.74) 23.69,29.21 ; v2(23.69,29.74) 23.36,29.74 ; v1(87.17,80.94) 87.17,81.12 ; v1(87.17,80.94) 87.35,80.94 ; v1(87.17,80.94) 86.47,80.94 ; v1(87.17,80.94) 87.17,80.62 ; v2(28.64,33.33) 28.81,33.33 ; v2(28.64,33.33) 28.64,34.04 ; v2(28.64,33.33) 28.64,33.16 ; v2(83.31,38.37) 83.31,38.55 ; v2(83.31,38.37) 83.66,38.37 ; v2(83.31,38.37) 83.31,37.7 ; C127.2 23.38,58.41 ; C127.2 23.04,58.74 ; C127.2 23.04,57.74 ; C127.2 22.71,58.41 ; 87.56,82.02 v1(87.94,82.02) ; v1(87.94,82.02) 88.28,82.02 ; v1(87.94,82.02) 87.94,81.39 ; v1(87.94,82.02) 87.94,82.37 ; 38.09,18.55 v2(38.09,18.76) ; v2(38.09,18.76) 38.37,18.76 ; v2(38.09,18.76) 38.09,19.2 ; v2(38.09,18.76) 37.89,18.76 ; v1(87.89,91.89) 87.89,92.41 ; v1(87.89,91.89) 87.46,91.89 ; v1(87.89,91.89) 88.38,91.89 ; v1(87.89,91.89) 87.89,91.46 ; v1(71.78,63.74) 72.3,63.74 ; v1(71.78,63.74) 71.36,63.74 ; v1(71.78,63.74) 71.78,64.23 ; v1(71.78,63.74) 71.78,63.32 ; 7.58,8.84 v2(7.76,8.84) ; v2(7.76,8.84) 7.76,9.2 ; v2(7.76,8.84) 7.76,8.66 ; v2(7.76,8.84) 8.34,8.84 ; v1(22.75,73.91) 22.97,73.91 ; v1(22.75,73.91) 22.75,74.13 ; v1(22.75,73.91) 22.75,73.53 ; v1(22.75,73.91) 22.12,73.91 ; 18.55,113.53 v2(19.33,113.53) ; v2(19.33,113.53) 19.33,113.76 ; v2(19.33,113.53) 19.5,113.53 ; v2(19.33,113.53) 19.33,113.37 ; v2(55.11,105.56) 55.69,105.56 ; v2(55.11,105.56) 55.11,105.89 ; v2(55.11,105.56) 55.11,105.14 ; v2(55.11,105.56) 54.78,105.56 ; 23.27,66.11 C106.2 22.77,65.92 ; 76.95,66.19 v2(77.1,66.19) ; v2(77.1,66.19) 77.77,66.19 ; v2(77.1,66.19) 77.1,66.54 ; v2(77.1,66.19) 77.1,66.04 ; 34.86,105.32 v2(34.98,105.32) ; v2(34.98,105.32) 34.98,105.15 ; v2(34.98,105.32) 35.09,105.32 ; 22.57,4.96 J20.38 ; J20.38 23.52,4.96 ; J20.38 22.99,4.49 ; J20.38 22.99,5.38 ; J4.5 77.86,81.38 ; J4.5 77.64,81.6 ; J4.5 76.86,81.38 ; J4.5 77.64,81.15 ; 86.42,53.73 J3.2 ; J3.2 87.18,53.96 ; J3.2 87.18,53.48 ; J3.2 87.4,53.73 ; v2(71.66,26.72) 71.66,26.9 ; v2(71.66,26.72) 71.66,26.23 ; v2(71.66,26.72) 71.48,26.72 ; v2(71.66,26.72) 72.17,26.72
  BOTTOM w0.254: D6.3 3.65,106.46 v1(3.64,106.45) ; J22.20 v2(42.48,108.38) ; 26.22,40.35 26.22,39.81 v2(26.86,39.17) ; v2(18.43,45.34) 18.83,44.93 C38.2 ; J22.8 v2(48.48,108.54) ; J22.23 v2(40.98,105.36) ; U27.2 32.72,39.32 32.26,38.86 ; C39.2 21.27,40.92 v2(20.92,41.28) ; J22.2 51.48,105.44 v2(51.32,105.28) ; 22.54,63.97 22.11,63.53 C119.2 ; R240.2 v1(8.58,62.43) ; J22.17 v2(43.98,105.46) ; v2(63.55,102.91) U7.11 65.75,102.91 U7.25 67.25,101.41 U7.2 ; J22.26 v2(39.48,105.28) ; J22.5 v2(49.98,105.38) ; v2(70.83,63.27) 71.08,63.02 72.05,63.02 ; J22.14 v2(45.48,105.34) ; J22.11 v2(46.98,108.54) ; J22.35 v2(34.98,105.32) ; J22.38 v2(33.48,105.3) ; J22.29 v2(37.98,105.3) ; J22.32 v2(36.48,105.3)
  BOTTOM w0.508: Q2.2 v2(42.39,85.26) ; v2(28.64,33.33) C47.2 27.24,33.33 ; U10.2 v2(20.55,34.09) ; 25.39,27.13 v2(26.2,27.13) ; C46.2 v2(21.6,29.19) ; C56.2 76.67,65.76 v2(77.1,66.19) ; D1.1 v2(82.84,57.77) ; R96.2 74.08,76.68 v2(73.29,77.47) ; C40.2 v2(24.73,49.14) ; v2(71.77,124.44) C59.2 v2(72.86,123.55) ; Q1.2 v2(67.54,13.74) ; D5.3 v2(3.52,114.28) ; C48.2 v2(28.44,31.98) ; C41.2 v2(21.89,49.14) ; R12.2 R14.1 v2(69.63,82.25) ; D4.1 v2(83.31,38.37) ; R64.1 v2(23.69,29.74) ; C71.2 51.83,103.76 51.4,104.19 v2(51.4,104.22) ; C58.2 v2(73.27,5.03) ; D2.1 v2(82.78,49.21) ; D3.1 v2(83.14,43.7)
  vias: v1(25.8,66.31) v1(25.8,65.04) v1(25.8,63.77) v2(5.23,34.23) v2(13.78,32.87) v2(14.83,21.57) v2(22.12,45.8) v2(22.12,44.53) v2(23.39,43.26) v2(24.66,43.26) v2(32.16,17.89) v2(32.78,18.57) v2(33.77,17.83) v2(47.17,18.67) v2(51.56,19.32) v2(65.57,101.22) v2(66.51,103.1) v2(66.51,102.11) v2(66.51,101.22) v2(66.55,95.78) v2(67.45,103.1) v2(67.45,102.11) v2(67.45,101.22)
